# EAGLE board rs485boardPanelize (EAGLE 9.0.0), part 1 of 3
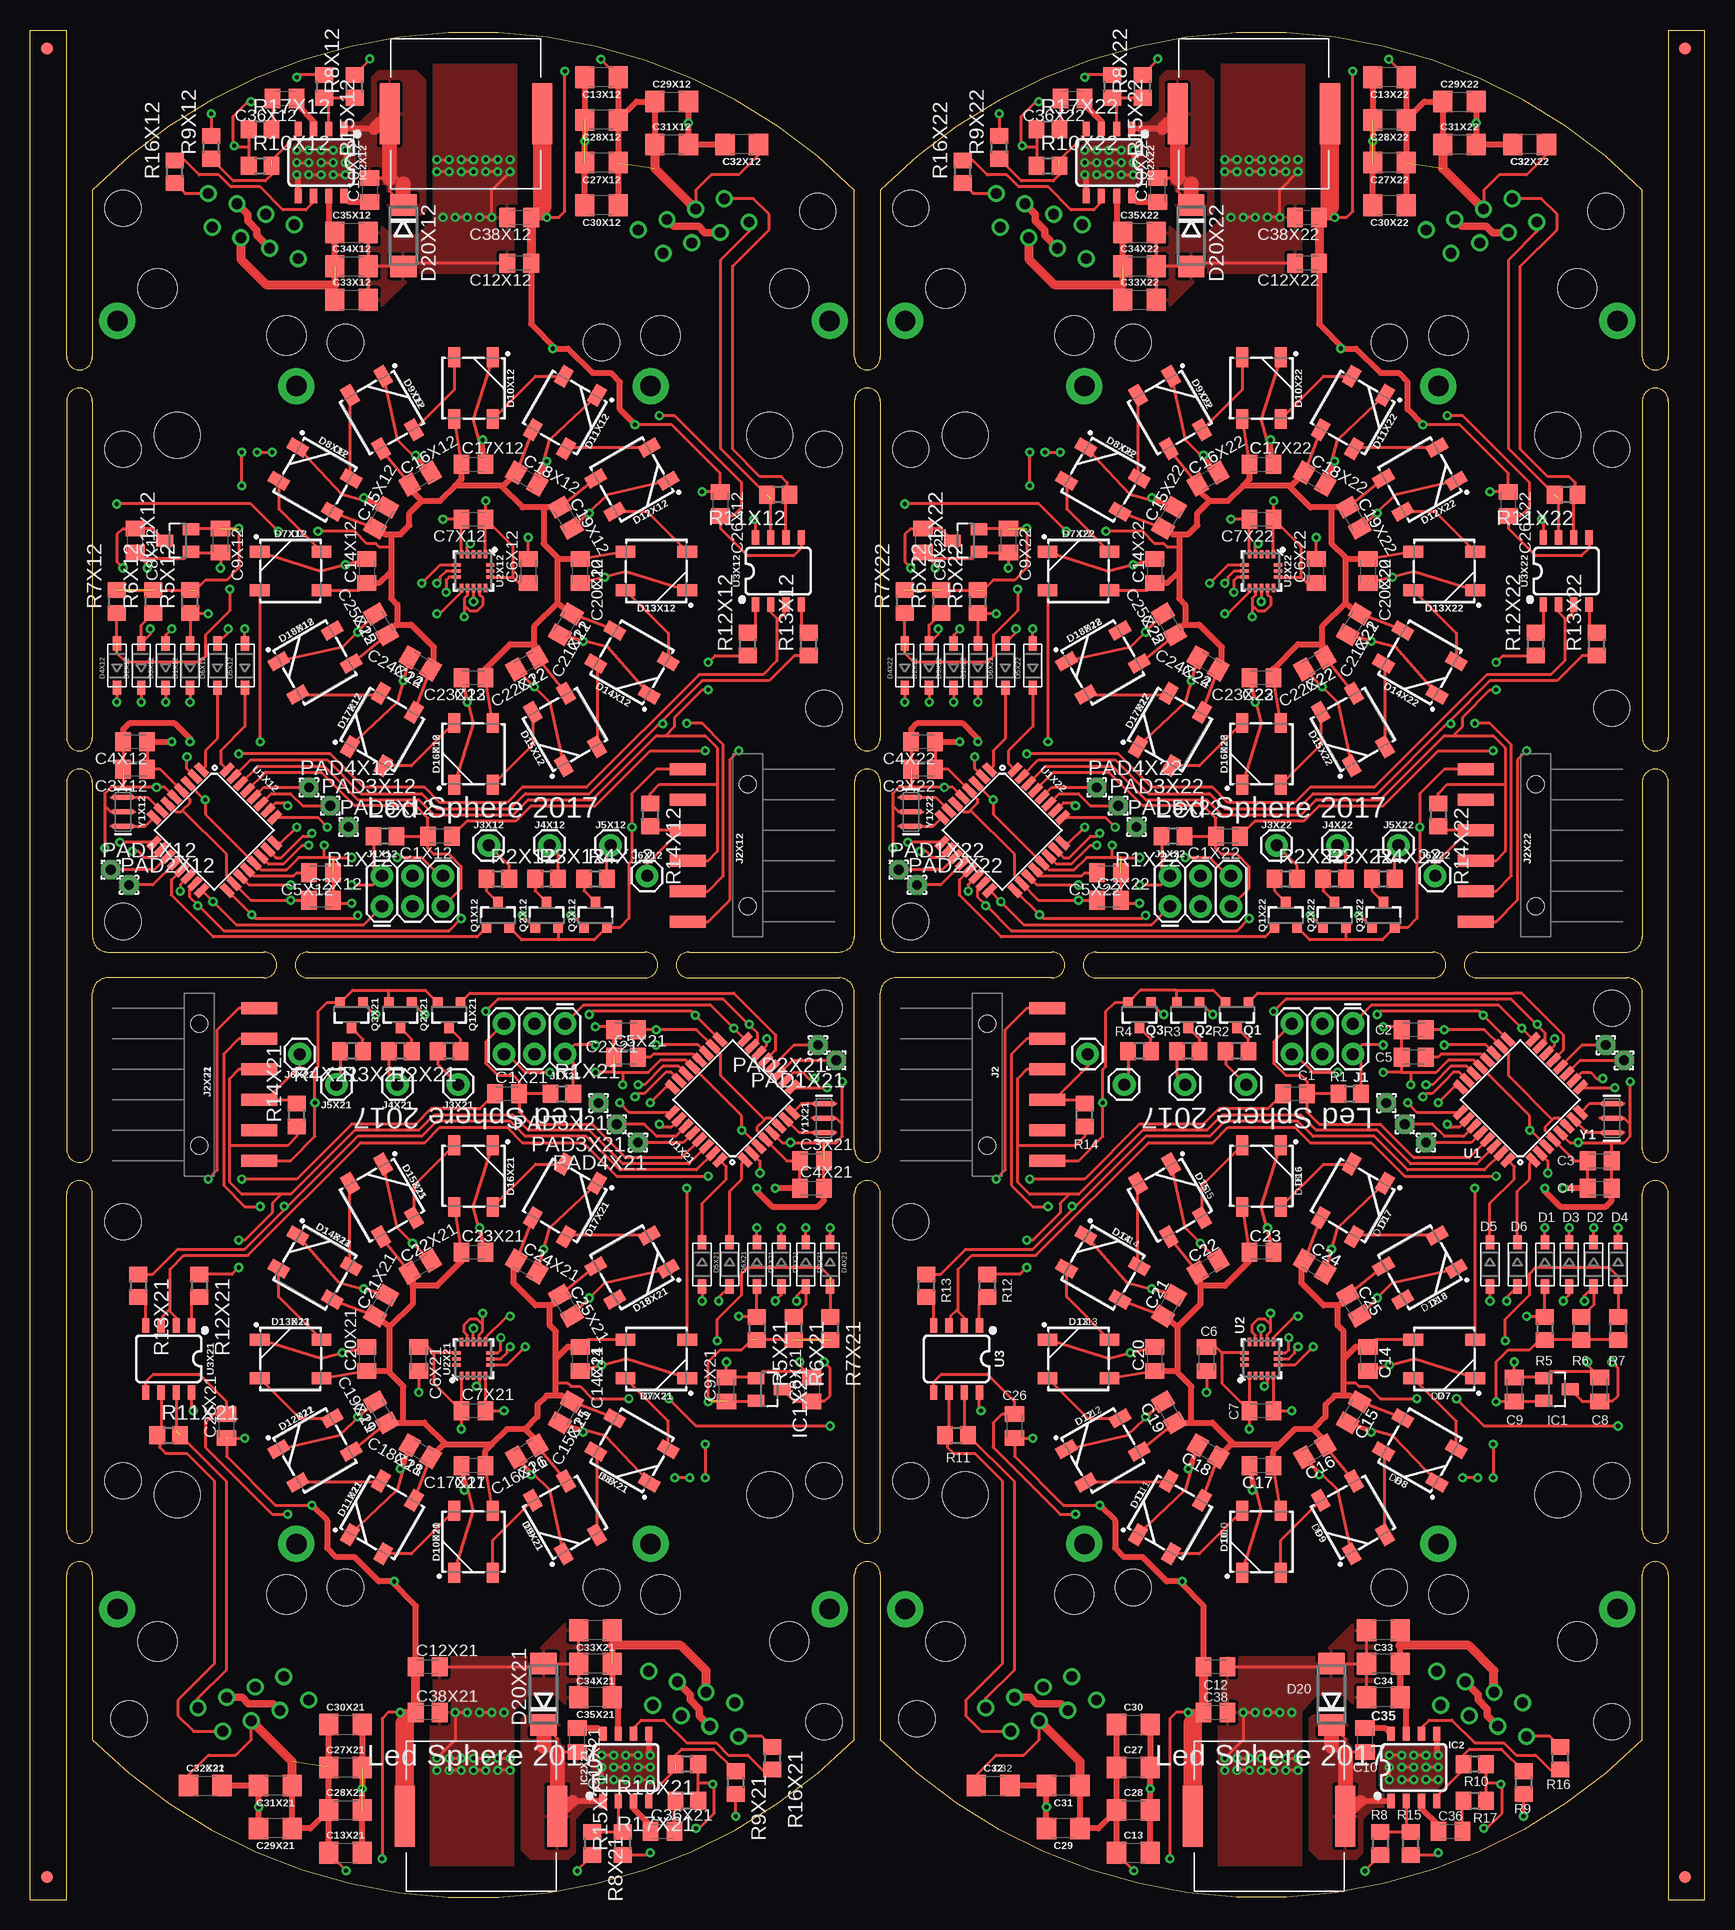
[diagram p0: board, top side]
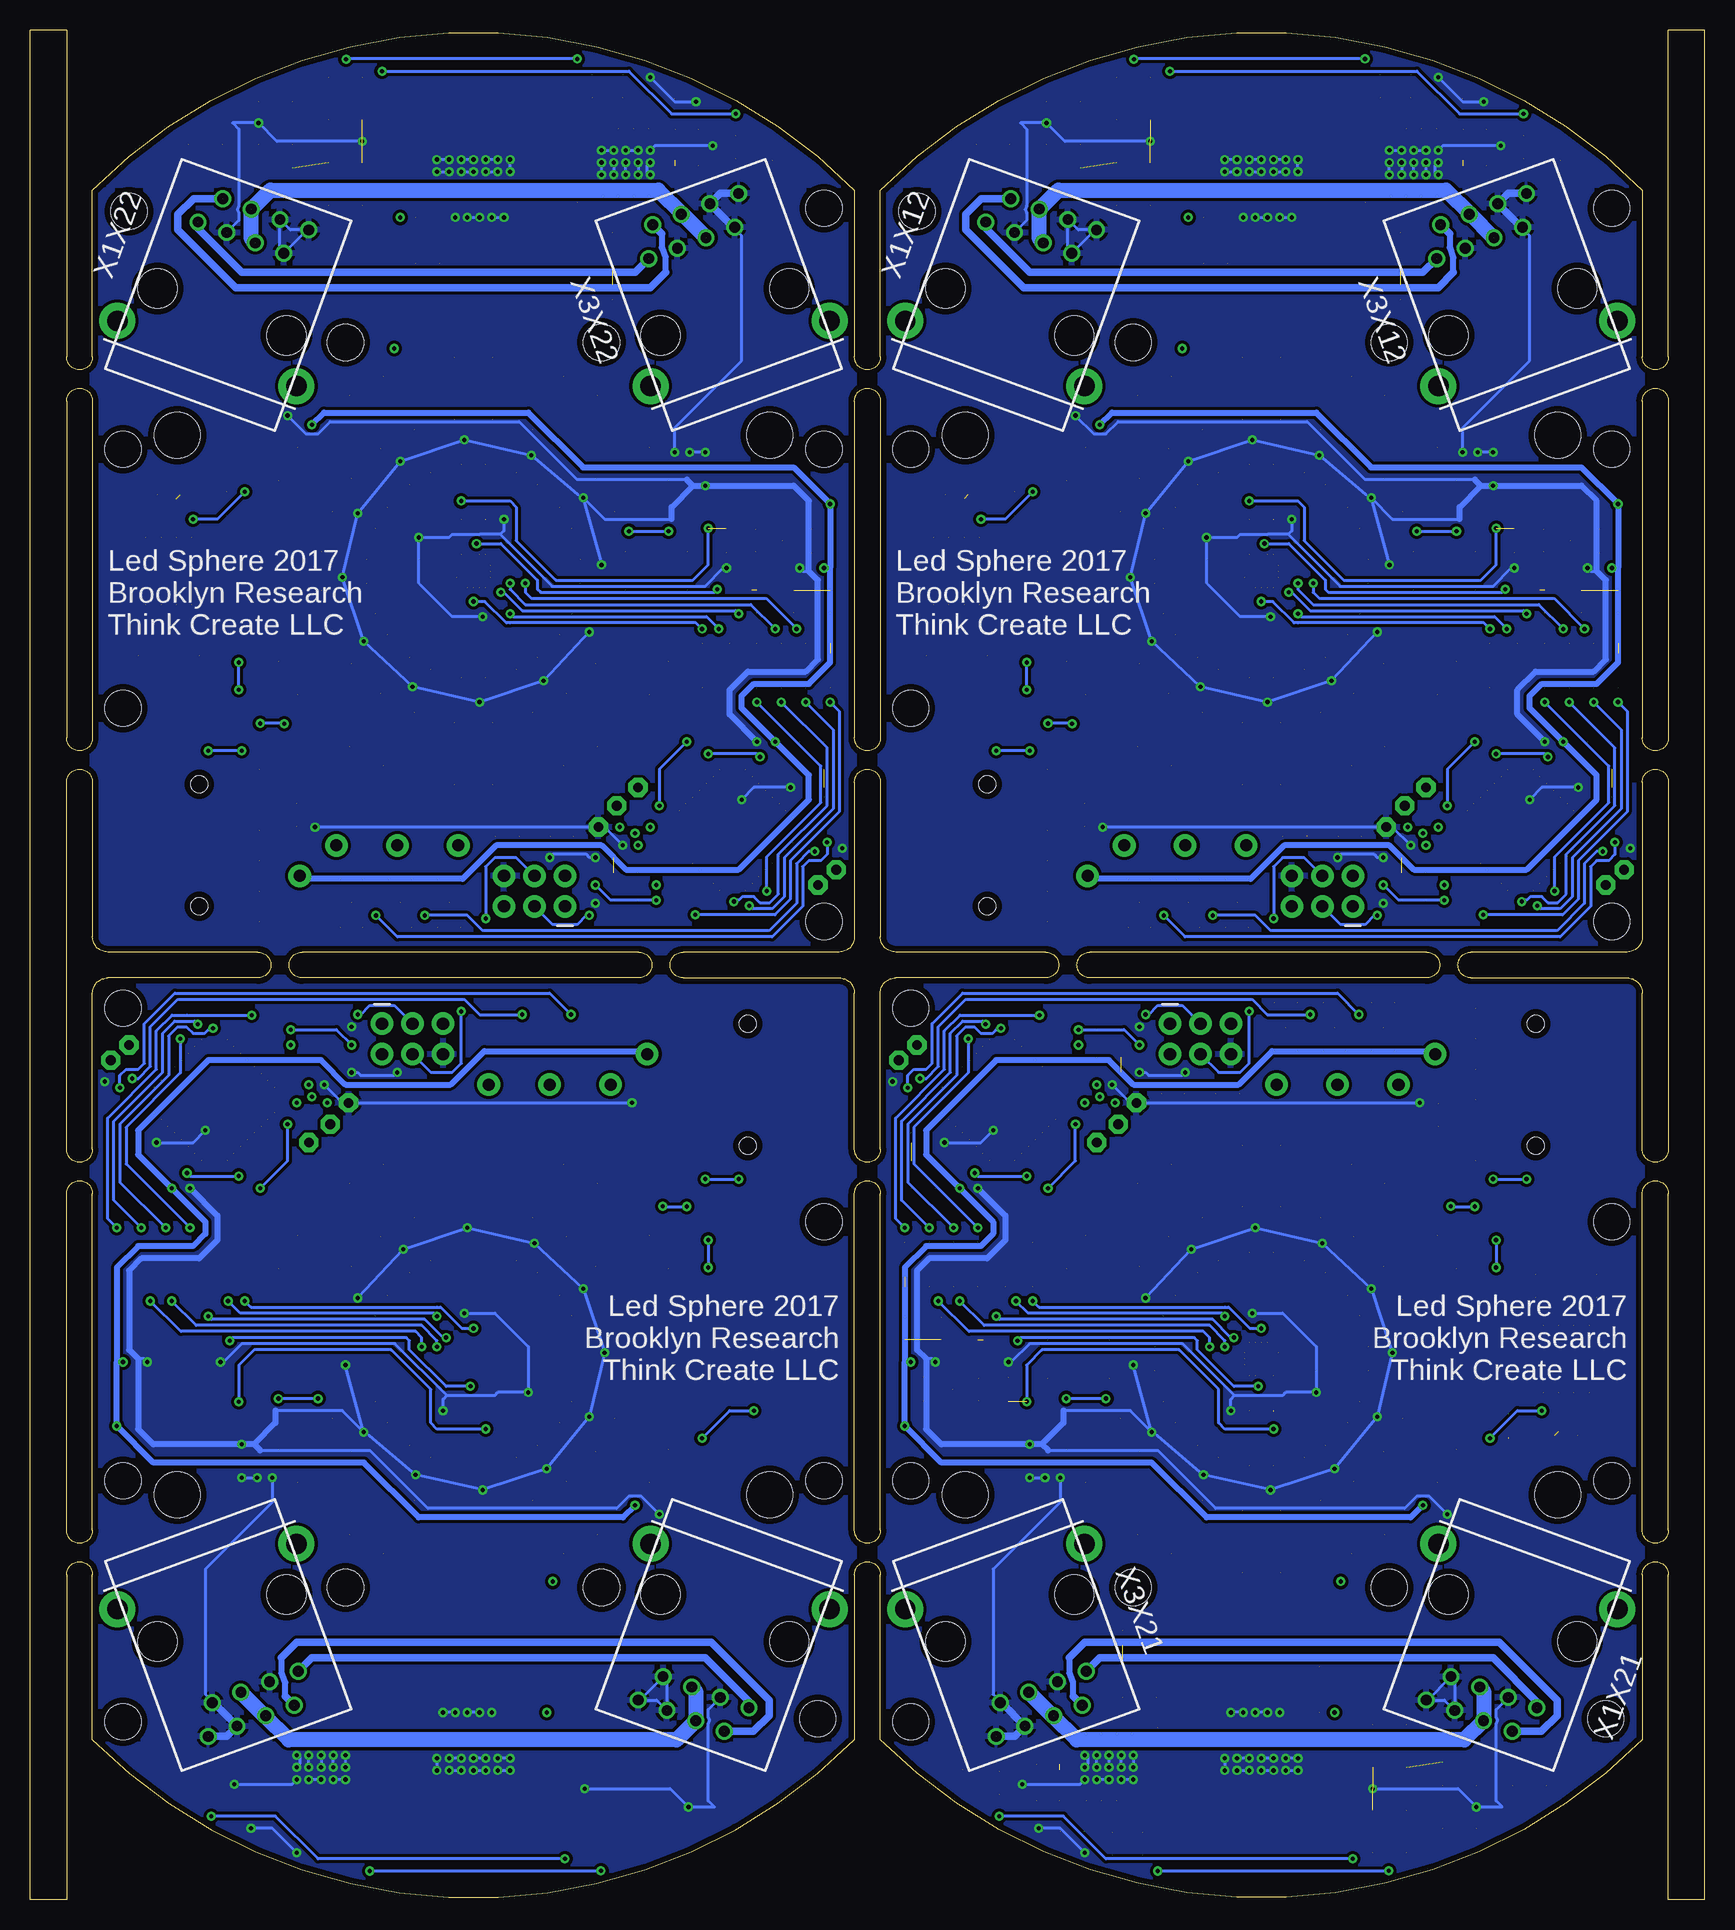
[diagram p1: board, bottom side, seen from below]

Size 139.57 x 155.83 mm. Coordinates in mm from the lower left corner, seen from the top.
Outline: 134.37,75.56 arc90 133.1,76.83
Outline: 6.48,78.99 19.49,78.99 arc-180 19.49,76.83 6.48,76.83
Outline: 5.21,80.26 arc90 6.48,78.99
Outline: 6.48,76.83 arc90 5.21,75.56
Outline: 133.1,78.99 arc90 134.37,80.26
Outline: 133.1,78.99 120.59,78.99 arc180 120.59,76.83 133.1,76.83
Outline: 6.48,76.83 arc90 5.21,75.56
Outline: 5.21,80.26 arc90 6.48,78.99
Outline: 5.21,75.56 5.21,62.55 arc-180 3.05,62.55 3.05,93.15 arc-180 5.21,93.15 5.21,80.26
Outline: 133.1,78.99 arc90 134.37,80.26
Outline: 134.37,75.56 arc90 133.1,76.83
Outline: 134.37,75.56 134.37,62.55 arc180 136.53,62.55 136.53,93.15 arc180 134.37,93.15 134.37,80.26
Outline: 72.14,76.83 arc90 70.87,75.56 70.87,62.55 arc-180 68.71,62.55 68.71,75.56 arc90 67.44,76.83 54.93,76.83 arc-180 54.93,78.99 67.44,78.99 arc90 68.71,80.26 68.71,93.15 arc-180 70.87,93.15 70.87,80.26 arc90 72.14,78.99 85.15,78.99 arc-180 85.15,76.83 72.14,76.83
Outline: 134.37,13.34 arc-90 70.87,13.34 70.87,27.11 arc180 68.71,27.11 68.71,13.34 arc-90 5.21,13.34 5.21,27.11 arc180 3.05,27.11 3.05,0 0,0 0,155.83 3.05,155.83 3.05,128.59 arc180 5.21,128.59 5.21,142.49 arc-90 68.71,142.49 68.71,128.59 arc180 70.87,128.59 70.87,142.49 arc-90 134.37,142.49 134.37,128.59 arc180 136.53,128.59 136.53,155.83 139.57,155.83 139.57,0 136.53,0 136.53,27.11 arc180 134.37,27.11 134.37,13.34
Outline: 23.18,78.99 arc180 23.18,76.83 51.24,76.83 arc180 51.24,78.99 23.18,78.99
Outline: 88.84,78.99 arc180 88.84,76.83 116.9,76.83 arc180 116.9,78.99 88.84,78.99
Outline: 68.71,30.8 arc180 70.87,30.8 70.87,58.86 arc180 68.71,58.86 68.71,30.8
Outline: 70.87,124.9 arc180 68.71,124.9 68.71,96.84 arc180 70.87,96.84 70.87,124.9
Outline: 3.05,30.8 arc180 5.21,30.8 5.21,58.86 arc180 3.05,58.86 3.05,30.8
Outline: 5.21,124.9 arc180 3.05,124.9 3.05,96.84 arc180 5.21,96.84 5.21,124.9
Outline: 134.37,30.8 arc180 136.53,30.8 136.53,58.86 arc180 134.37,58.86 134.37,30.8
Outline: 136.53,124.9 arc180 134.37,124.9 134.37,96.84 arc180 136.53,96.84 136.53,124.9
Copper layers (1*16): Top 0.035mm / dielectric 1.5mm / Bottom 0.035mm
Design rules "eagleRules *": minimum track width 10mil, minimum drill 0.3mm, track to track 10mil, track to pad 10mil, pad to pad 8mil, via to via 10mil, smd to smd 8mil, copper to edge 20mil, drill to drill 20mil, minimum pad ring 10mil, minimum via ring 8mil, stop-mask expansion 4mil, vias tented up to drill 14mil, thermal gap 10mil
Holes 3 mm at 131.83,74.3 73.41,56.52 131.83,34.92 73.41,34.92 113.28,26.04 91.95,26.04 131.83,14.86 73.91,15.11 7.75,81.53 66.17,99.31 7.75,120.9 66.17,120.9 26.29,129.79 47.62,129.79 7.75,140.97 65.66,140.72 66.17,74.3 7.75,56.52 66.17,34.92 7.75,34.92 47.62,26.04 26.29,26.04 66.17,14.86 8.25,15.11 73.41,81.53 131.83,99.31 73.41,120.9 131.83,120.9 91.95,129.79 113.28,129.79 73.41,140.97 131.32,140.72
Holes 3.81 mm at 127.3,33.76 77.93,33.76 12.27,122.07 61.65,122.07 61.65,33.76 12.27,33.76 77.93,122.07 127.3,122.07

## Footprints (pad centres in the part's own frame; a part is rotated, then mirrored left to right if it is on the bottom)
C0805K = smd 1.3 x 1.6: 1 -1,0; 2 1,0
1206 = smd 1.6 x 1.8: 1 -1.4,0; 2 1.4,0
SOD-123 = smd 1.2 x 0.7: A 1.85,0; C -1.85,0
WS2812B = smd 1.651 x 1: 1 2.577,-1.6; 2 2.577,1.6; 3 -2.577,1.6; 4 -2.577,-1.6
DO214AA = smd 1.8 x 2.2: A 2.55,0; C -2.55,0
FIDUCIAL-1X2 = smd 1 x 1: 1 0,0
SOT23 = smd 1 x 1.4: 1 -0.95,-1.1; 2 0.95,-1.1; 3 0,1.1
SO08 = smd 0.6 x 1.2: 1 -1.905,-2.8; 2 -0.635,-2.8; 3 0.635,-2.8; 4 1.905,-2.8; 5 1.905,2.8; 6 0.635,2.8; 7 -0.635,2.8; 8 -1.905,2.8
2X3 = drill 1.016 pad 1.88: 1 0,0; 2 0,2.54; 3 2.54,0; 4 2.54,2.54; 5 5.08,0; 6 5.08,2.54
1X06-SMD_RA_MALE = smd 1 x 3: 1 -6.35,5; 2 -3.81,5; 3 -1.27,5; 4 1.27,5; 5 3.81,5; 6 6.35,5 | hole 1.4: -5.08,0; 5.08,0
1X01 = drill 1.016 pad 1.88: 1 0,0
SLF12575 = smd 1.676 x 5.08: P$1 -6.35,0; P$2 6.35,0
1,6/0,8 = drill 0.813 pad 1.6 octagon: 1 0,0
SOT23-3 = smd 0.8 x 0.9: 1 -0.95,-1; 2 0.95,-1; 3 0,1.1
R0805 = smd 1.3 x 1.5: 1 -0.95,0; 2 0.95,0
TQFP32-08 = smd 1.27 x 0.559: 1 -4.293,2.8; 2 -4.293,2; 3 -4.293,1.2; 4 -4.293,0.4; 5 -4.293,-0.4; 6 -4.293,-1.2; 7 -4.293,-2; 8 -4.293,-2.8; 17 4.293,-2.8; 18 4.293,-2; 19 4.293,-1.2; 20 4.293,-0.4; 21 4.293,0.4; 22 4.293,1.2; 23 4.293,2; 24 4.293,2.8 | smd 0.559 x 1.27: 9 -2.8,-4.293; 10 -2,-4.293; 11 -1.2,-4.293; 12 -0.4,-4.293; 13 0.4,-4.293; 14 1.2,-4.293; 15 2,-4.293; 16 2.8,-4.293; 25 2.8,4.293; 26 2,4.293; 27 1.2,4.293; 28 0.4,4.293; 29 -0.4,4.293; 30 -1.2,4.293; 31 -2,4.293; 32 -2.8,4.293
LGA-16-3X3 = smd 0.7 x 0.28: 1 -1.4,1; 2 -1.4,0.5; 3 -1.4,0; 4 -1.4,-0.5; 5 -1.4,-1; 9 1.4,-1; 10 1.4,-0.5; 11 1.4,0; 12 1.4,0.5; 13 1.4,1 | smd 0.28 x 0.7: 6 -0.5,-1.4; 7 0,-1.4; 8 0.5,-1.4; 14 0.5,1.4; 15 0,1.4; 16 -0.5,1.4
RJ45-SHIELD-DS1128-S80BP = drill 0.9 pad 1.4: 1 -4.445,6.35; 2 -3.175,8.89; 3 -1.905,6.35; 4 -0.635,8.89; 5 0.635,6.35; 6 1.905,8.89; 7 3.175,6.35; 8 4.445,8.89 | drill 1.7 pad 3: SHIELD1 -7.94,-3.68; SHIELD2 7.94,-3.68 | hole 3.251: -5.715,0; 5.715,0
RESONATOR-SMD-3.2X1.3 = smd 0.45 x 1.905: 1 -1.2,0; 2 0,0; 3 1.2,0

## Placement (x,y rotation side)
C1  0.1uF  [C0805K]  105.41,67.18 0 top
C1X12  0.1uF  [C0805K]  34.16,88.65 180 top
C1X21  0.1uF  [C0805K]  39.75,67.18 0 top
C1X22  0.1uF  [C0805K]  99.82,88.65 180 top
C2  10uF  [C0805K]  115.32,72.52 180 top
C2X12  10uF  [C0805K]  24.26,83.31 0 top
C2X21  10uF  [C0805K]  49.66,72.52 180 top
C2X22  10uF  [C0805K]  89.92,83.31 0 top
C3  0.1uF  [C0805K]  130.81,61.59 0 top
C3X12  0.1uF  [C0805K]  8.76,94.23 180 top
C3X21  0.1uF  [C0805K]  65.15,61.59 0 top
C3X22  0.1uF  [C0805K]  74.42,94.23 180 top
C4  0.1uF  [C0805K]  130.81,59.31 0 top
C4X12  0.1uF  [C0805K]  8.76,96.52 180 top
C4X21  0.1uF  [C0805K]  65.15,59.31 0 top
C4X22  0.1uF  [C0805K]  74.42,96.52 180 top
C5  0.1uF  [C0805K]  115.32,70.23 0 top
C5X12  0.1uF  [C0805K]  24.26,85.6 180 top
C5X21  0.1uF  [C0805K]  49.66,70.23 0 top
C5X22  0.1uF  [C0805K]  89.92,85.6 180 top
C6  10uF  [C0805K]  98.04,45.09 270 top
C6X12  10uF  [C0805K]  41.53,110.74 90 top
C6X21  10uF  [C0805K]  32.38,45.09 270 top
C6X22  10uF  [C0805K]  107.19,110.74 90 top
C7  0.1uF  [C0805K]  102.62,40.77 0 top
C7X12  0.1uF  [C0805K]  36.96,115.06 180 top
C7X21  0.1uF  [C0805K]  36.96,40.77 0 top
C7X22  0.1uF  [C0805K]  102.62,115.06 180 top
C8  0.1uF  [C0805K]  130.81,42.55 90 top
C8X12  0.1uF  [C0805K]  8.76,113.28 270 top
C8X21  0.1uF  [C0805K]  65.15,42.55 90 top
C8X22  0.1uF  [C0805K]  74.42,113.28 270 top
C9  0.1uF  [C0805K]  123.7,42.55 90 top
C9X12  0.1uF  [C0805K]  15.88,113.28 270 top
C9X21  0.1uF  [C0805K]  58.04,42.55 90 top
C9X22  0.1uF  [C0805K]  81.53,113.28 270 top
C10  0.1uF  [C0805K]  111.25,13.34 270 top
C10X12  0.1uF  [C0805K]  28.32,142.49 90 top
C10X21  0.1uF  [C0805K]  45.59,13.34 270 top
C10X22  0.1uF  [C0805K]  93.98,142.49 90 top
C12  10uF  [C0805K]  98.81,19.43 0 top
C12X12  10uF  [C0805K]  40.77,136.4 180 top
C12X21  10uF  [C0805K]  33.15,19.43 0 top
C12X22  10uF  [C0805K]  106.43,136.4 180 top
C13  1uF 100V  [1206]  91.95,3.94 0 top
C13X12  1uF 100V  [1206]  47.62,151.89 180 top
C13X21  1uF 100V  [1206]  26.29,3.94 0 top
C13X22  1uF 100V  [1206]  113.28,151.89 180 top
C14  0.1uF  [C0805K]  111.51,45.09 270 top
C14X12  0.1uF  [C0805K]  28.07,110.74 90 top
C14X21  0.1uF  [C0805K]  45.85,45.09 270 top
C14X22  0.1uF  [C0805K]  93.73,110.74 90 top
C15  0.1uF  [C0805K]  110.31,40.64 240 top
C15X12  0.1uF  [C0805K]  29.26,115.19 60 top
C15X21  0.1uF  [C0805K]  44.65,40.64 240 top
C15X22  0.1uF  [C0805K]  94.92,115.19 60 top
C16  0.1uF  [C0805K]  107.06,37.39 210 top
C16X12  0.1uF  [C0805K]  32.51,118.44 30 top
C16X21  0.1uF  [C0805K]  41.4,37.39 210 top
C16X22  0.1uF  [C0805K]  98.17,118.44 30 top
C17  0.1uF  [C0805K]  102.62,36.2 180 top
C17X12  0.1uF  [C0805K]  36.96,119.63 0 top
C17X21  0.1uF  [C0805K]  36.96,36.2 180 top
C17X22  0.1uF  [C0805K]  102.62,119.63 0 top
C18  0.1uF  [C0805K]  98.17,37.39 150 top
C18X12  0.1uF  [C0805K]  41.4,118.44 330 top
C18X21  0.1uF  [C0805K]  32.51,37.39 150 top
C18X22  0.1uF  [C0805K]  107.06,118.44 330 top
C19  0.1uF  [C0805K]  94.92,40.64 120 top
C19X12  0.1uF  [C0805K]  44.65,115.19 300 top
C19X21  0.1uF  [C0805K]  29.26,40.64 120 top
C19X22  0.1uF  [C0805K]  110.31,115.19 300 top
C20  0.1uF  [C0805K]  93.73,45.09 90 top
C20X12  0.1uF  [C0805K]  45.85,110.74 270 top
C20X21  0.1uF  [C0805K]  28.07,45.09 90 top
C20X22  0.1uF  [C0805K]  111.51,110.74 270 top
C21  0.1uF  [C0805K]  94.92,49.53 60 top
C21X12  0.1uF  [C0805K]  44.65,106.3 240 top
C21X21  0.1uF  [C0805K]  29.26,49.53 60 top
C21X22  0.1uF  [C0805K]  110.31,106.3 240 top
C22  0.1uF  [C0805K]  98.17,52.78 30 top
C22X12  0.1uF  [C0805K]  41.4,103.05 210 top
C22X21  0.1uF  [C0805K]  32.51,52.78 30 top
C22X22  0.1uF  [C0805K]  107.06,103.05 210 top
C23  0.1uF  [C0805K]  102.62,53.98 0 top
C23X12  0.1uF  [C0805K]  36.96,101.85 180 top
C23X21  0.1uF  [C0805K]  36.96,53.98 0 top
C23X22  0.1uF  [C0805K]  102.62,101.85 180 top
C24  0.1uF  [C0805K]  107.06,52.78 330 top
C24X12  0.1uF  [C0805K]  32.51,103.05 150 top
C24X21  0.1uF  [C0805K]  41.4,52.78 330 top
C24X22  0.1uF  [C0805K]  98.17,103.05 150 top
C25  0.1uF  [C0805K]  110.31,49.53 300 top
C25X12  0.1uF  [C0805K]  29.26,106.3 120 top
C25X21  0.1uF  [C0805K]  44.65,49.53 300 top
C25X22  0.1uF  [C0805K]  94.92,106.3 120 top
C26  0.1uF  [C0805K]  82.04,39.5 90 top
C26X12  0.1uF  [C0805K]  57.53,116.33 270 top
C26X21  0.1uF  [C0805K]  16.38,39.5 90 top
C26X22  0.1uF  [C0805K]  123.19,116.33 270 top
C27  1uF 100V  [1206]  91.95,11.05 0 top
C27X12  1uF 100V  [1206]  47.62,144.78 180 top
C27X21  1uF 100V  [1206]  26.29,11.05 0 top
C27X22  1uF 100V  [1206]  113.28,144.78 180 top
C28  1uF 100V  [1206]  91.95,7.49 0 top
C28X12  1uF 100V  [1206]  47.62,148.34 180 top
C28X21  1uF 100V  [1206]  26.29,7.49 0 top
C28X22  1uF 100V  [1206]  113.28,148.34 180 top
C29  1uF 100V  [1206]  86.11,5.97 180 top
C29X12  1uF 100V  [1206]  53.47,149.86 0 top
C29X21  1uF 100V  [1206]  20.45,5.97 180 top
C29X22  1uF 100V  [1206]  119.13,149.86 0 top
C30  1uF 100V  [1206]  91.95,14.61 0 top
C30X12  1uF 100V  [1206]  47.62,141.22 180 top
C30X21  1uF 100V  [1206]  26.29,14.61 0 top
C30X22  1uF 100V  [1206]  113.28,141.22 180 top
C31  1uF 100V  [1206]  86.11,9.53 180 top
C31X12  1uF 100V  [1206]  53.47,146.3 0 top
C31X21  1uF 100V  [1206]  20.45,9.53 180 top
C31X22  1uF 100V  [1206]  119.13,146.3 0 top
C32  1uF 100V  [1206]  80.26,9.53 0 top
C32X12  1uF 100V  [1206]  59.31,146.3 180 top
C32X21  1uF 100V  [1206]  14.61,9.53 0 top
C32X22  1uF 100V  [1206]  124.97,146.3 180 top
C33  1uF 100V  [1206]  112.78,22.48 180 top
C33X12  1uF 100V  [1206]  26.8,133.35 0 top
C33X21  1uF 100V  [1206]  47.12,22.48 180 top
C33X22  1uF 100V  [1206]  92.46,133.35 0 top
C34  1uF 100V  [1206]  112.78,19.68 180 top
C34X12  1uF 100V  [1206]  26.8,136.14 0 top
C34X21  1uF 100V  [1206]  47.12,19.68 180 top
C34X22  1uF 100V  [1206]  92.46,136.14 0 top
C35  1uF 100V  [1206]  112.78,16.89 180 top
C35X12  1uF 100V  [1206]  26.8,138.94 0 top
C35X21  1uF 100V  [1206]  47.12,16.89 180 top
C35X22  1uF 100V  [1206]  92.46,138.94 0 top
C36  150pF  [C0805K]  118.36,5.71 0 top
C36X12  150pF  [C0805K]  21.21,150.11 180 top
C36X21  150pF  [C0805K]  52.7,5.71 0 top
C36X22  150pF  [C0805K]  86.87,150.11 180 top
C38  10uF  [C0805K]  98.81,15.62 0 top
C38X12  10uF  [C0805K]  40.77,140.21 180 top
C38X21  10uF  [C0805K]  33.15,15.62 0 top
C38X22  10uF  [C0805K]  106.43,140.21 180 top
D1  5819  [SOD-123]  126.24,52.96 270 top
D1X12  5819  [SOD-123]  13.34,102.87 90 top
D1X21  5819  [SOD-123]  60.58,52.96 270 top
D1X22  5819  [SOD-123]  78.99,102.87 90 top
D2  5819  [SOD-123]  130.3,52.96 270 top
D2X12  5819  [SOD-123]  9.27,102.87 90 top
D2X21  5819  [SOD-123]  64.64,52.96 270 top
D2X22  5819  [SOD-123]  74.93,102.87 90 top
D3  5819  [SOD-123]  128.27,52.96 270 top
D3X12  5819  [SOD-123]  11.3,102.87 90 top
D3X21  5819  [SOD-123]  62.61,52.96 270 top
D3X22  5819  [SOD-123]  76.96,102.87 90 top
D4  5819  [SOD-123]  132.33,52.96 270 top
D4X12  5819  [SOD-123]  7.24,102.87 90 top
D4X21  5819  [SOD-123]  66.67,52.96 270 top
D4X22  5819  [SOD-123]  72.9,102.87 90 top
D5  5819  [SOD-123]  121.67,52.96 270 top
D5X12  5819  [SOD-123]  17.91,102.87 90 top
D5X21  5819  [SOD-123]  56.01,52.96 270 top
D5X22  5819  [SOD-123]  83.57,102.87 90 top
D6  5819  [SOD-123]  123.95,52.96 270 top
D6X12  5819  [SOD-123]  15.62,102.87 90 top
D6X21  5819  [SOD-123]  58.29,52.96 270 top
D6X22  5819  [SOD-123]  81.28,102.87 90 top
D7  WS2812B  [WS2812B]  117.86,45.09 180 top
D7X12  WS2812B  [WS2812B]  21.72,110.74 0 top
D7X21  WS2812B  [WS2812B]  52.2,45.09 180 top
D7X22  WS2812B  [WS2812B]  87.38,110.74 0 top
D8  WS2812B  [WS2812B]  115.82,37.47 150 top
D8X12  WS2812B  [WS2812B]  23.75,118.36 330 top
D8X21  WS2812B  [WS2812B]  50.16,37.47 150 top
D8X22  WS2812B  [WS2812B]  89.41,118.36 330 top
D9  WS2812B  [WS2812B]  110.24,31.88 120 top
D9X12  WS2812B  [WS2812B]  29.34,123.95 300 top
D9X21  WS2812B  [WS2812B]  44.58,31.88 120 top
D9X22  WS2812B  [WS2812B]  95,123.95 300 top
D10  WS2812B  [WS2812B]  102.62,29.84 90 top
D10X12  WS2812B  [WS2812B]  36.96,125.98 270 top
D10X21  WS2812B  [WS2812B]  36.96,29.84 90 top
D10X22  WS2812B  [WS2812B]  102.62,125.98 270 top
D11  WS2812B  [WS2812B]  95,31.88 60 top
D11X12  WS2812B  [WS2812B]  44.58,123.95 240 top
D11X21  WS2812B  [WS2812B]  29.34,31.88 60 top
D11X22  WS2812B  [WS2812B]  110.24,123.95 240 top
D12  WS2812B  [WS2812B]  89.41,37.47 30 top
D12X12  WS2812B  [WS2812B]  50.16,118.36 210 top
D12X21  WS2812B  [WS2812B]  23.75,37.47 30 top
D12X22  WS2812B  [WS2812B]  115.82,118.36 210 top
D13  WS2812B  [WS2812B]  87.38,45.09 0 top
D13X12  WS2812B  [WS2812B]  52.2,110.74 180 top
D13X21  WS2812B  [WS2812B]  21.72,45.09 0 top
D13X22  WS2812B  [WS2812B]  117.86,110.74 180 top
D14  WS2812B  [WS2812B]  89.41,52.7 330 top
D14X12  WS2812B  [WS2812B]  50.16,103.12 150 top
D14X21  WS2812B  [WS2812B]  23.75,52.7 330 top
D14X22  WS2812B  [WS2812B]  115.82,103.12 150 top
D15  WS2812B  [WS2812B]  95,58.29 300 top
D15X12  WS2812B  [WS2812B]  44.58,97.54 120 top
D15X21  WS2812B  [WS2812B]  29.34,58.29 300 top
D15X22  WS2812B  [WS2812B]  110.24,97.54 120 top
D16  WS2812B  [WS2812B]  102.62,60.33 270 top
D16X12  WS2812B  [WS2812B]  36.96,95.5 90 top
D16X21  WS2812B  [WS2812B]  36.96,60.33 270 top
D16X22  WS2812B  [WS2812B]  102.62,95.5 90 top
D17  WS2812B  [WS2812B]  110.24,58.29 240 top
D17X12  WS2812B  [WS2812B]  29.34,97.54 60 top
D17X21  WS2812B  [WS2812B]  44.58,58.29 240 top
D17X22  WS2812B  [WS2812B]  95,97.54 60 top
D18  WS2812B  [WS2812B]  115.82,52.7 210 top
D18X12  WS2812B  [WS2812B]  23.75,103.12 30 top
D18X21  WS2812B  [WS2812B]  50.16,52.7 210 top
D18X22  WS2812B  [WS2812B]  89.41,103.12 30 top
D20  B280-13-F  [DO214AA]  108.46,17.14 90 top
D20X12  B280-13-F  [DO214AA]  31.12,138.68 270 top
D20X21  B280-13-F  [DO214AA]  42.8,17.14 90 top
D20X22  B280-13-F  [DO214AA]  96.77,138.68 270 top
E$1  [FIDUCIAL-1X2]  1.4,154.31 0 top
E$2  [FIDUCIAL-1X2]  1.4,1.91 0 top
E$3  [FIDUCIAL-1X2]  137.92,1.91 0 top
E$4  [FIDUCIAL-1X2]  137.92,154.31 0 top
IC1  XC6206P332MR  [SOT23]  127.25,42.55 270 top
IC1X12  XC6206P332MR  [SOT23]  12.32,113.28 90 top
IC1X21  XC6206P332MR  [SOT23]  61.59,42.55 270 top
IC1X22  XC6206P332MR  [SOT23]  77.98,113.28 90 top
IC2  MP2562  [SO08]  115.32,11.05 0 top
IC2X12  MP2562  [SO08]  24.26,144.78 180 top
IC2X21  MP2562  [SO08]  49.66,11.05 0 top
IC2X22  MP2562  [SO08]  89.92,144.78 180 top
J1  AVR_SPI_PROG_3X2PTH  [2X3]  110.24,73.03 180 top
J1X12  AVR_SPI_PROG_3X2PTH  [2X3]  29.34,82.8 0 top
J1X21  AVR_SPI_PROG_3X2PTH  [2X3]  44.58,73.03 180 top
J1X22  AVR_SPI_PROG_3X2PTH  [2X3]  95,82.8 0 top
J2  RA 6Pin SMD  [1X06-SMD_RA_MALE]  79.76,67.94 270 top
J2X12  RA 6Pin SMD  [1X06-SMD_RA_MALE]  59.82,87.88 90 top
J2X21  RA 6Pin SMD  [1X06-SMD_RA_MALE]  14.1,67.94 270 top
J2X22  RA 6Pin SMD  [1X06-SMD_RA_MALE]  125.48,87.88 90 top
J3  [1X01]  101.35,67.94 180 top
J3X12  [1X01]  38.23,87.88 0 top
J3X21  [1X01]  35.69,67.94 180 top
J3X22  [1X01]  103.89,87.88 0 top
J4  [1X01]  96.27,67.94 180 top
J4X12  [1X01]  43.31,87.88 0 top
J4X21  [1X01]  30.61,67.94 180 top
J4X22  [1X01]  108.97,87.88 0 top
J5  [1X01]  91.19,67.94 180 top
J5X12  [1X01]  48.39,87.88 0 top
J5X21  [1X01]  25.53,67.94 180 top
J5X22  [1X01]  114.05,87.88 0 top
J6  [1X01]  88.14,70.48 180 top
J6X12  [1X01]  51.44,85.34 0 top
J6X21  [1X01]  22.48,70.48 180 top
J6X22  [1X01]  117.09,85.34 0 top
L1  15uH  [SLF12575]  103.25,6.99 180 top
L1X12  15uH  [SLF12575]  36.32,148.84 0 top
L1X21  15uH  [SLF12575]  37.59,6.99 180 top
L1X22  15uH  [SLF12575]  101.98,148.84 0 top
PAD1  [1,6/0,8]  132.84,69.98 180 top
PAD1X12  [1,6/0,8]  6.73,85.85 0 top
PAD1X21  [1,6/0,8]  67.18,69.98 180 top
PAD1X22  [1,6/0,8]  72.39,85.85 0 top
PAD2  [1,6/0,8]  131.32,71.25 180 top
PAD2X12  [1,6/0,8]  8.25,84.58 0 top
PAD2X21  [1,6/0,8]  65.66,71.25 180 top
PAD2X22  [1,6/0,8]  73.91,84.58 0 top
PAD3  [1,6/0,8]  114.55,64.64 180 top
PAD3X12  [1,6/0,8]  25.02,91.19 0 top
PAD3X21  [1,6/0,8]  48.9,64.64 180 top
PAD3X22  [1,6/0,8]  90.68,91.19 0 top
PAD4  [1,6/0,8]  116.33,63.12 180 top
PAD4X12  [1,6/0,8]  23.24,92.71 0 top
PAD4X21  [1,6/0,8]  50.67,63.12 180 top
PAD4X22  [1,6/0,8]  88.9,92.71 0 top
PAD5  [1,6/0,8]  113.03,66.42 180 top
PAD5X12  [1,6/0,8]  26.54,89.41 0 top
PAD5X21  [1,6/0,8]  47.37,66.42 180 top
PAD5X22  [1,6/0,8]  92.2,89.41 0 top
Q1  CJ3404  [SOT23-3]  100.58,73.79 180 top
Q1X12  CJ3404  [SOT23-3]  38.99,82.04 0 top
Q1X21  CJ3404  [SOT23-3]  34.92,73.79 180 top
Q1X22  CJ3404  [SOT23-3]  104.65,82.04 0 top
Q2  CJ3404  [SOT23-3]  96.52,73.79 180 top
Q2X12  CJ3404  [SOT23-3]  43.05,82.04 0 top
Q2X21  CJ3404  [SOT23-3]  30.86,73.79 180 top
Q2X22  CJ3404  [SOT23-3]  108.71,82.04 0 top
Q3  CJ3404  [SOT23-3]  92.46,73.79 180 top
Q3X12  CJ3404  [SOT23-3]  47.12,82.04 0 top
Q3X21  CJ3404  [SOT23-3]  26.8,73.79 180 top
Q3X22  CJ3404  [SOT23-3]  112.78,82.04 0 top
R1  10K  [R0805]  109.98,67.18 0 top
R1X12  10K  [R0805]  29.59,88.65 180 top
R1X21  10K  [R0805]  44.32,67.18 0 top
R1X22  10K  [R0805]  95.25,88.65 180 top
R2  DNP  [R0805]  100.58,70.74 180 top
R2X12  DNP  [R0805]  38.99,85.09 0 top
R2X21  DNP  [R0805]  34.92,70.74 180 top
R2X22  DNP  [R0805]  104.65,85.09 0 top
R3  DNP  [R0805]  96.52,70.74 180 top
R3X12  DNP  [R0805]  43.05,85.09 0 top
R3X21  DNP  [R0805]  30.86,70.74 180 top
R3X22  DNP  [R0805]  108.71,85.09 0 top
R4  DNP  [R0805]  92.46,70.74 180 top
R4X12  DNP  [R0805]  47.12,85.09 0 top
R4X21  DNP  [R0805]  26.8,70.74 180 top
R4X22  DNP  [R0805]  112.78,85.09 0 top
R5  10K  [R0805]  126.24,47.62 270 top
R5X12  10K  [R0805]  13.34,108.2 90 top
R5X21  10K  [R0805]  60.58,47.62 270 top
R5X22  10K  [R0805]  78.99,108.2 90 top
R6  10K  [R0805]  129.29,47.62 270 top
R6X12  10K  [R0805]  10.29,108.2 90 top
R6X21  10K  [R0805]  63.63,47.62 270 top
R6X22  10K  [R0805]  75.95,108.2 90 top
R7  10K  [R0805]  132.33,47.62 270 top
R7X12  10K  [R0805]  7.24,108.2 90 top
R7X21  10K  [R0805]  66.67,47.62 270 top
R7X22  10K  [R0805]  72.9,108.2 90 top
R8  100K  [R0805]  112.52,4.7 270 top
R8X12  100K  [R0805]  27.05,151.13 90 top
R8X21  100K  [R0805]  46.86,4.7 270 top
R8X22  100K  [R0805]  92.71,151.13 90 top
R9  210K  [R0805]  124.46,9.78 270 top
R9X12  210K  [R0805]  15.11,146.05 90 top
R9X21  210K  [R0805]  58.8,9.78 270 top
R9X22  210K  [R0805]  80.77,146.05 90 top
R10  40.2k  [R0805]  120.4,11.3 180 top
R10X12  40.2k  [R0805]  19.18,144.53 0 top
R10X21  40.2k  [R0805]  54.74,11.3 180 top
R10X22  40.2k  [R0805]  84.84,144.53 0 top
R11  120  [R0805]  77.22,38.73 0 top
R11X12  120  [R0805]  62.36,117.09 180 top
R11X21  120  [R0805]  11.56,38.73 0 top
R11X22  120  [R0805]  128.02,117.09 180 top
R12  1K  [R0805]  79.76,51.18 270 top
R12X12  1K  [R0805]  59.82,104.65 90 top
R12X21  1K  [R0805]  14.1,51.18 270 top
R12X22  1K  [R0805]  125.48,104.65 90 top
R13  1K  [R0805]  74.68,51.18 270 top
R13X12  1K  [R0805]  64.9,104.65 90 top
R13X21  1K  [R0805]  9.02,51.18 270 top
R13X22  1K  [R0805]  130.56,104.65 90 top
R14  10K  [R0805]  87.88,65.41 90 top
R14X12  10K  [R0805]  51.69,90.42 270 top
R14X21  10K  [R0805]  22.23,65.41 90 top
R14X22  10K  [R0805]  117.35,90.42 270 top
R15  17.4K  [R0805]  115.06,4.7 90 top
R15X12  17.4K  [R0805]  24.51,151.13 270 top
R15X21  17.4K  [R0805]  49.4,4.7 90 top
R15X22  17.4K  [R0805]  90.17,151.13 270 top
R16  200K  [R0805]  127.51,11.81 270 top
R16X12  200K  [R0805]  12.06,144.02 90 top
R16X21  200K  [R0805]  61.85,11.81 270 top
R16X22  200K  [R0805]  77.72,144.02 90 top
R17  158K  [R0805]  120.4,8.26 180 top
R17X12  158K  [R0805]  19.18,147.57 0 top
R17X21  158K  [R0805]  54.74,8.26 180 top
R17X22  158K  [R0805]  84.84,147.57 0 top
U1  ATMEGA328P_TQFP  [TQFP32-08]  124.21,66.67 135 top
U1X12  ATMEGA328P_TQFP  [TQFP32-08]  15.37,89.15 315 top
U1X21  ATMEGA328P_TQFP  [TQFP32-08]  58.55,66.67 135 top
U1X22  ATMEGA328P_TQFP  [TQFP32-08]  81.03,89.15 315 top
U2  LIS3DH  [LGA-16-3X3]  102.62,45.09 90 top
U2X12  LIS3DH  [LGA-16-3X3]  36.96,110.74 270 top
U2X21  LIS3DH  [LGA-16-3X3]  36.96,45.09 90 top
U2X22  LIS3DH  [LGA-16-3X3]  102.62,110.74 270 top
U3  SP485  [SO08]  77.22,45.09 180 top
U3X12  SP485  [SO08]  62.36,110.74 0 top
U3X21  SP485  [SO08]  11.56,45.09 180 top
U3X22  SP485  [SO08]  128.02,110.74 0 top
X1  RJ45-8P8C-8L-B  [RJ45-SHIELD-DS1128-S80BP]  81.66,23.5 160 bottom
X1X12  RJ45-8P8C-8L-B  [RJ45-SHIELD-DS1128-S80BP]  57.91,132.33 340 bottom
X1X21  RJ45-8P8C-8L-B  [RJ45-SHIELD-DS1128-S80BP]  16,23.5 160 bottom
X1X22  RJ45-8P8C-8L-B  [RJ45-SHIELD-DS1128-S80BP]  123.57,132.33 340 bottom
X3  RJ45-8P8C-8L-B  [RJ45-SHIELD-DS1128-S80BP]  123.57,23.5 200 bottom
X3X12  RJ45-8P8C-8L-B  [RJ45-SHIELD-DS1128-S80BP]  16,132.33 20 bottom
X3X21  RJ45-8P8C-8L-B  [RJ45-SHIELD-DS1128-S80BP]  57.91,23.5 200 bottom
X3X22  RJ45-8P8C-8L-B  [RJ45-SHIELD-DS1128-S80BP]  81.66,132.33 20 bottom
Y1  16MHz  [RESONATOR-SMD-3.2X1.3]  131.83,65.15 90 top
Y1X12  16MHz  [RESONATOR-SMD-3.2X1.3]  7.75,90.68 270 top
Y1X21  16MHz  [RESONATOR-SMD-3.2X1.3]  66.17,65.15 90 top
Y1X22  16MHz  [RESONATOR-SMD-3.2X1.3]  73.41,90.68 270 top

## Library data of the parts
C1 C3-C5 C7-C10 C14-C26 = resistor; LCSC: C29926
C1X12 C1X21 C1X22 C2X12 C2X21 C2X22 C3X12 C3X21 C3X22 C4X12 C4X21 C4X22 C5X12 C5X21 C5X22 C6X12 C6X21 C6X22 C7X12 C7X21 C7X22 C8X12 C8X21 C8X22 C9X12 C9X21 C9X22 C10X12 C10X21 C10X22 C12X12 C12X21 C12X22 C14X12 C14X21 C14X22 C15X12 C15X21 C15X22 C16X12 C16X21 C16X22 C17X12 C17X21 C17X22 C18X12 C18X21 C18X22 C19X12 C19X21 C19X22 C20X12 C20X21 C20X22 C21X12 C21X21 C21X22 C22X12 C22X21 C22X22 C23X12 C23X21 C23X22 C24X12 C24X21 C24X22 C25X12 C25X21 C25X22 C26X12 C26X21 C26X22 C36X12 C36X21 C36X22 C38X12 C38X21 C38X22 R1X12 R1X21 R1X22 R2 R2X12 R2X21 R2X22 R3 R3X12 R3X21 R3X22 R4 R4X12 R4X21 R4X22 R5X12 R5X21 R5X22 R6X12 R6X21 R6X22 R7X12 R7X21 R7X22 R8X12 R8X21 R8X22 R9X12 R9X21 R9X22 R10X12 R10X21 R10X22 R11 R11X12 R11X21 R11X22 R12X12 R12X21 R12X22 R13X12 R13X21 R13X22 R14X12 R14X21 R14X22 R15X12 R15X21 R15X22 R16X12 R16X21 R16X22 R17X12 R17X21 R17X22 = resistor
C2 C6 C12 C38 = resistor; LCSC: C92341
C13 C27-C35 = SparkFun-Capacitors; LCSC: C91151; PROD_ID: CAP-10057
C13X12 C13X21 C13X22 C27X12 C27X21 C27X22 C28X12 C28X21 C28X22 C29X12 C29X21 C29X22 C30X12 C30X21 C30X22 C31X12 C31X21 C31X22 C32X12 C32X21 C32X22 C33X12 C33X21 C33X22 C34X12 C34X21 C34X22 C35X12 C35X21 C35X22 = SparkFun-Capacitors
C36 = resistor; LCSC: C152846
D1-D6 = adafruit; LCSC: C64885
D1X12 D1X21 D1X22 D2X12 D2X21 D2X22 D3X12 D3X21 D3X22 D4X12 D4X21 D4X22 D5X12 D5X21 D5X22 D6X12 D6X21 D6X22 = adafruit
D7-D18 = SparkFun-LED; LCSC: C114585; PROD_ID: DIO-12503
D7X12 D7X21 D7X22 D8X12 D8X21 D8X22 D9X12 D9X21 D9X22 D10X12 D10X21 D10X22 D11X12 D11X21 D11X22 D12X12 D12X21 D12X22 D13X12 D13X21 D13X22 D14X12 D14X21 D14X22 D15X12 D15X21 D15X22 D16X12 D16X21 D16X22 D17X12 D17X21 D17X22 D18X12 D18X21 D18X22 = SparkFun-LED
D20 = diode; LCSC: C134445
D20X12 D20X21 D20X22 = diode
E$1-E$4 = SparkFun-Aesthetics
IC1 = linear; LCSC: C5446
IC1X12 IC1X21 IC1X22 = linear
IC2 = misc; LCSC: C93647
IC2X12 IC2X21 IC2X22 L1X12 L1X21 L1X22 = misc
J1 J1X12 J1X21 J1X22 J2X12 J2X21 J2X22 J3 J3X12 J3X21 J3X22 J4 J4X12 J4X21 J4X22 J5 J5X12 J5X21 J5X22 J6 J6X12 J6X21 J6X22 = SparkFun-Connectors
J2 = SparkFun-Connectors; PROD_ID: CONN-08971
L1 = misc; LCSC: C136211
PAD1 PAD1X12 PAD1X21 PAD1X22 PAD2 PAD2X12 PAD2X21 PAD2X22 PAD3 PAD3X12 PAD3X21 PAD3X22 PAD4 PAD4X12 PAD4X21 PAD4X22 PAD5 PAD5X12 PAD5X21 PAD5X22 = wirepad
Q1-Q3 = SparkFun-DiscreteSemi; PROD_ID: TRANS-12988
Q1X12 Q1X21 Q1X22 Q2X12 Q2X21 Q2X22 Q3X12 Q3X21 Q3X22 = SparkFun-DiscreteSemi
R1 R5-R7 R14 = resistor; LCSC: C17414
R8 = resistor; LCSC: C96346
R9 = resistor; LCSC: C170839
R10 = resistor; LCSC: C104303
R12 R13 = resistor; LCSC: C115316
R15 = resistor; LCSC: C144583
R16 = resistor; LCSC: C17539
R17 = resistor; LCSC: C104013
U1 = SparkFun-IC-Microcontroller; LCSC: C14877; PROD_ID: IC-09069
U1X12 U1X21 U1X22 = SparkFun-IC-Microcontroller
U2 = SparkFun-Sensors; LCSC: C15134; PROD_ID: IC-13419; SF_ID: N/A
U2X12 U2X21 U2X22 = SparkFun-Sensors
U3 = SparkFun-IC-Comms; LCSC: C6855; PROD_ID: IC-09388
U3X12 U3X21 U3X22 = SparkFun-IC-Comms
X1 X3 = myownParts; LCSC: C86586; MF: TYCO ELECTRONICS; MPN: RJ45-8L-B; OC_FARNELL: 1279843; OC_NEWARK: 52K4445
X1X12 X1X21 X1X22 X3X12 X3X21 X3X22 = myownParts
Y1 = SparkFun-Clocks; LCSC: C91584; PROD_ID: XTAL-08900
Y1X12 Y1X21 Y1X22 = SparkFun-Clocks

## Nets
+3V3: C6.1 C7.1 C9.1 IC1.2 R5.2 R6.2 R7.2 U2.1 U2.14
+3V3X12: C6X12.1 C7X12.1 C9X12.1 IC1X12.2 R5X12.2 R6X12.2 R7X12.2 U2X12.1 U2X12.14
+3V3X21: C6X21.1 C7X21.1 C9X21.1 IC1X21.2 R5X21.2 R6X21.2 R7X21.2 U2X21.1 U2X21.14
+3V3X22: C6X22.1 C7X22.1 C9X22.1 IC1X22.2 R5X22.2 R6X22.2 R7X22.2 U2X22.1 U2X22.14
+5V: C2.1 C3.1 C4.1 C8.1 C12.1 C14.1 C15.1 C16.1 C17.1 C18.1 C19.1 C20.1 C21.1 C22.1 C23.1 C24.1 C25.1 C26.1 C38.1 D7.1 D8.1 D9.1 D10.1 D11.1 D12.1 D13.1 D14.1 D15.1 D16.1 D17.1 D18.1 IC1.3 J1.2 J2.4 J6.1 L1.P$2 R1.2 R9.2 R14.2 U1.4 U1.6 U1.18 U3.8
+5VX12: C2X12.1 C3X12.1 C4X12.1 C8X12.1 C12X12.1 C14X12.1 C15X12.1 C16X12.1 C17X12.1 C18X12.1 C19X12.1 C20X12.1 C21X12.1 C22X12.1 C23X12.1 C24X12.1 C25X12.1 C26X12.1 C38X12.1 D7X12.1 D8X12.1 D9X12.1 D10X12.1 D11X12.1 D12X12.1 D13X12.1 D14X12.1 D15X12.1 D16X12.1 D17X12.1 D18X12.1 IC1X12.3 J1X12.2 J2X12.4 J6X12.1 L1X12.P$2 R1X12.2 R9X12.2 R14X12.2 U1X12.4 U1X12.6 U1X12.18 U3X12.8
+5VX21: C2X21.1 C3X21.1 C4X21.1 C8X21.1 C12X21.1 C14X21.1 C15X21.1 C16X21.1 C17X21.1 C18X21.1 C19X21.1 C20X21.1 C21X21.1 C22X21.1 C23X21.1 C24X21.1 C25X21.1 C26X21.1 C38X21.1 D7X21.1 D8X21.1 D9X21.1 D10X21.1 D11X21.1 D12X21.1 D13X21.1 D14X21.1 D15X21.1 D16X21.1 D17X21.1 D18X21.1 IC1X21.3 J1X21.2 J2X21.4 J6X21.1 L1X21.P$2 R1X21.2 R9X21.2 R14X21.2 U1X21.4 U1X21.6 U1X21.18 U3X21.8
+5VX22: C2X22.1 C3X22.1 C4X22.1 C8X22.1 C12X22.1 C14X22.1 C15X22.1 C16X22.1 C17X22.1 C18X22.1 C19X22.1 C20X22.1 C21X22.1 C22X22.1 C23X22.1 C24X22.1 C25X22.1 C26X22.1 C38X22.1 D7X22.1 D8X22.1 D9X22.1 D10X22.1 D11X22.1 D12X22.1 D13X22.1 D14X22.1 D15X22.1 D16X22.1 D17X22.1 D18X22.1 IC1X22.3 J1X22.2 J2X22.4 J6X22.1 L1X22.P$2 R1X22.2 R9X22.2 R14X22.2 U1X22.4 U1X22.6 U1X22.18 U3X22.8
+24V: C13.1 C27.1 C28.1 C29.1 C30.1 C31.1 C32.1 C33.1 C34.1 C35.1 IC2.7 R8.2 X1.4 X1.5 X3.4 X3.5
+24VX12: C13X12.1 C27X12.1 C28X12.1 C29X12.1 C30X12.1 C31X12.1 C32X12.1 C33X12.1 C34X12.1 C35X12.1 IC2X12.7 R8X12.2 X1X12.4 X1X12.5 X3X12.4 X3X12.5
+24VX21: C13X21.1 C27X21.1 C28X21.1 C29X21.1 C30X21.1 C31X21.1 C32X21.1 C33X21.1 C34X21.1 C35X21.1 IC2X21.7 R8X21.2 X1X21.4 X1X21.5 X3X21.4 X3X21.5
+24VX22: C13X22.1 C27X22.1 C28X22.1 C29X22.1 C30X22.1 C31X22.1 C32X22.1 C33X22.1 C34X22.1 C35X22.1 IC2X22.7 R8X22.2 X1X22.4 X1X22.5 X3X22.4 X3X22.5
A0: U1.23
A1: U1.24
A2: U1.25
A3: D7.4 U1.26
A3X12: D7X12.4 U1X12.26
A3X21: D7X21.4 U1X21.26
A3X22: D7X22.4 U1X22.26
A4: PAD3.1 U1.27
A4X12: PAD3X12.1 U1X12.27
A4X21: PAD3X21.1 U1X21.27
A4X22: PAD3X22.1 U1X22.27
A5: PAD4.1 U1.28
A5X12: PAD4X12.1 U1X12.28
A5X21: PAD4X21.1 U1X21.28
A5X22: PAD4X22.1 U1X22.28
A6: U1.19
A7: U1.22
AREF: C5.2 U1.20
AREFX12: C5X12.2 U1X12.20
AREFX21: C5X21.2 U1X21.20
AREFX22: C5X22.2 U1X22.20
BST: C10.1 IC2.8
BSTX12: C10X12.1 IC2X12.8
BSTX21: C10X21.1 IC2X21.8
BSTX22: C10X22.1 IC2X22.8
COMP: C36.1 IC2.3
COMPX12: C36X12.1 IC2X12.3
COMPX21: C36X21.1 IC2X21.3
COMPX22: C36X22.1 IC2X22.3
D2: D5.C U1.32
D2X12: D5X12.C U1X12.32
D2X21: D5X21.C U1X21.32
D2X22: D5X22.C U1X22.32
D3: D6.C U1.1
D3X12: D6X12.C U1X12.1
D3X21: D6X21.C U1X21.1
D3X22: D6X22.C U1X22.1
D5: Q3.1 U1.9
D5X12: Q3X12.1 U1X12.9
D5X21: Q3X21.1 U1X21.9
D5X22: Q3X22.1 U1X22.9
D6: Q2.1 U1.10
D6X12: Q2X12.1 U1X12.10
D6X21: Q2X21.1 U1X21.10
D6X22: Q2X22.1 U1X22.10
D7: PAD1.1 U1.11
D7X12: PAD1X12.1 U1X12.11
D7X21: PAD1X21.1 U1X21.11
D7X22: PAD1X22.1 U1X22.11
D8: PAD2.1 U1.12
D8X12: PAD2X12.1 U1X12.12
D8X21: PAD2X21.1 U1X21.12
D8X22: PAD2X22.1 U1X22.12
D9: Q1.1 U1.13
D9X12: Q1X12.1 U1X12.13
D9X21: Q1X21.1 U1X21.13
D9X22: Q1X22.1 U1X22.13
DIR: U1.2 U3.2 U3.3
DIRX12: U1X12.2 U3X12.2 U3X12.3
DIRX21: U1X21.2 U3X21.2 U3X21.3
DIRX22: U1X22.2 U3X22.2 U3X22.3
EN: IC2.2 R8.1 R15.2
ENX12: IC2X12.2 R8X12.1 R15X12.2
ENX21: IC2X21.2 R8X21.1 R15X21.2
ENX22: IC2X22.2 R8X22.1 R15X22.2
FB: IC2.4 R9.1 R10.2
FBX12: IC2X12.4 R9X12.1 R10X12.2
FBX21: IC2X21.4 R9X21.1 R10X21.2
FBX22: IC2X22.4 R9X22.1 R10X22.2
FREQ: IC2.6 R16.2
FREQX12: IC2X12.6 R16X12.2
FREQX21: IC2X21.6 R16X21.2
FREQX22: IC2X22.6 R16X22.2
GND: C2.2 C3.2 C4.2 C5.1 C6.2 C7.2 C8.2 C9.2 C12.2 C13.2 C14.2 C15.2 C16.2 C17.2 C18.2 C19.2 C20.2 C21.2 C22.2 C23.2 C24.2 C25.2 C26.2 C27.2 C28.2 C29.2 C30.2 C31.2 C32.2 C33.2 C34.2 C35.2 C38.2 D7.3 D8.3 D9.3 D10.3 D11.3 D12.3 D13.3 D14.3 D15.3 D16.3 D17.3 D18.3 D20.A IC1.1 IC2.5 J1.6 J2.6 PAD5.1 Q1.2 Q2.2 Q3.2 R10.1 R15.1 R16.1 R17.1 U1.3 U1.5 U1.21 U2.5 U2.10 U2.12 U3.5 X1.3 X1.6 X1.7 X1.8 X3.3 X3.6 X3.7 X3.8 Y1.2
GNDX12: C2X12.2 C3X12.2 C4X12.2 C5X12.1 C6X12.2 C7X12.2 C8X12.2 C9X12.2 C12X12.2 C13X12.2 C14X12.2 C15X12.2 C16X12.2 C17X12.2 C18X12.2 C19X12.2 C20X12.2 C21X12.2 C22X12.2 C23X12.2 C24X12.2 C25X12.2 C26X12.2 C27X12.2 C28X12.2 C29X12.2 C30X12.2 C31X12.2 C32X12.2 C33X12.2 C34X12.2 C35X12.2 C38X12.2 D7X12.3 D8X12.3 D9X12.3 D10X12.3 D11X12.3 D12X12.3 D13X12.3 D14X12.3 D15X12.3 D16X12.3 D17X12.3 D18X12.3 D20X12.A IC1X12.1 IC2X12.5 J1X12.6 J2X12.6 PAD5X12.1 Q1X12.2 Q2X12.2 Q3X12.2 R10X12.1 R15X12.1 R16X12.1 R17X12.1 U1X12.3 U1X12.5 U1X12.21 U2X12.5 U2X12.10 U2X12.12 U3X12.5 X1X12.3 X1X12.6 X1X12.7 X1X12.8 X3X12.3 X3X12.6 X3X12.7 X3X12.8 Y1X12.2
GNDX21: C2X21.2 C3X21.2 C4X21.2 C5X21.1 C6X21.2 C7X21.2 C8X21.2 C9X21.2 C12X21.2 C13X21.2 C14X21.2 C15X21.2 C16X21.2 C17X21.2 C18X21.2 C19X21.2 C20X21.2 C21X21.2 C22X21.2 C23X21.2 C24X21.2 C25X21.2 C26X21.2 C27X21.2 C28X21.2 C29X21.2 C30X21.2 C31X21.2 C32X21.2 C33X21.2 C34X21.2 C35X21.2 C38X21.2 D7X21.3 D8X21.3 D9X21.3 D10X21.3 D11X21.3 D12X21.3 D13X21.3 D14X21.3 D15X21.3 D16X21.3 D17X21.3 D18X21.3 D20X21.A IC1X21.1 IC2X21.5 J1X21.6 J2X21.6 PAD5X21.1 Q1X21.2 Q2X21.2 Q3X21.2 R10X21.1 R15X21.1 R16X21.1 R17X21.1 U1X21.3 U1X21.5 U1X21.21 U2X21.5 U2X21.10 U2X21.12 U3X21.5 X1X21.3 X1X21.6 X1X21.7 X1X21.8 X3X21.3 X3X21.6 X3X21.7 X3X21.8 Y1X21.2
GNDX22: C2X22.2 C3X22.2 C4X22.2 C5X22.1 C6X22.2 C7X22.2 C8X22.2 C9X22.2 C12X22.2 C13X22.2 C14X22.2 C15X22.2 C16X22.2 C17X22.2 C18X22.2 C19X22.2 C20X22.2 C21X22.2 C22X22.2 C23X22.2 C24X22.2 C25X22.2 C26X22.2 C27X22.2 C28X22.2 C29X22.2 C30X22.2 C31X22.2 C32X22.2 C33X22.2 C34X22.2 C35X22.2 C38X22.2 D7X22.3 D8X22.3 D9X22.3 D10X22.3 D11X22.3 D12X22.3 D13X22.3 D14X22.3 D15X22.3 D16X22.3 D17X22.3 D18X22.3 D20X22.A IC1X22.1 IC2X22.5 J1X22.6 J2X22.6 PAD5X22.1 Q1X22.2 Q2X22.2 Q3X22.2 R10X22.1 R15X22.1 R16X22.1 R17X22.1 U1X22.3 U1X22.5 U1X22.21 U2X22.5 U2X22.10 U2X22.12 U3X22.5 X1X22.3 X1X22.6 X1X22.7 X1X22.8 X3X22.3 X3X22.6 X3X22.7 X3X22.8 Y1X22.2
INT1: D5.A U2.11
INT1X12: D5X12.A U2X12.11
INT1X21: D5X21.A U2X21.11
INT1X22: D5X22.A U2X22.11
INT2: D6.A U2.9
INT2X12: D6X12.A U2X12.9
INT2X21: D6X21.A U2X21.9
INT2X22: D6X22.A U2X22.9
MISO: D3.C J1.1 U1.16
MISO_3.3V: D3.A U2.7
MISO_3.3VX12: D3X12.A U2X12.7
MISO_3.3VX21: D3X21.A U2X21.7
MISO_3.3VX22: D3X22.A U2X22.7
MISOX12: D3X12.C J1X12.1 U1X12.16
MISOX21: D3X21.C J1X21.1 U1X21.16
MISOX22: D3X22.C J1X22.1 U1X22.16
MOSI: D2.C J1.4 U1.15
MOSI_3.3V: D2.A R6.1 U2.6
MOSI_3.3VX12: D2X12.A R6X12.1 U2X12.6
MOSI_3.3VX21: D2X21.A R6X21.1 U2X21.6
MOSI_3.3VX22: D2X22.A R6X22.1 U2X22.6
MOSIX12: D2X12.C J1X12.4 U1X12.15
MOSIX21: D2X21.C J1X21.4 U1X21.15
MOSIX22: D2X22.C J1X22.4 U1X22.15
N$1: Q1.3 R2.1
N$1X12: Q1X12.3 R2X12.1
N$1X21: Q1X21.3 R2X21.1
N$1X22: Q1X22.3 R2X22.1
N$2: D7.2 D8.4
N$2X12: D7X12.2 D8X12.4
N$2X21: D7X21.2 D8X21.4
N$2X22: D7X22.2 D8X22.4
N$3: D8.2 D9.4
N$3X12: D8X12.2 D9X12.4
N$3X21: D8X21.2 D9X21.4
N$3X22: D8X22.2 D9X22.4
N$4: J3.1 R2.2
N$4X12: J3X12.1 R2X12.2
N$4X21: J3X21.1 R2X21.2
N$4X22: J3X22.1 R2X22.2
N$5: Q2.3 R3.1
N$5X12: Q2X12.3 R3X12.1
N$5X21: Q2X21.3 R3X21.1
N$5X22: Q2X22.3 R3X22.1
N$6: J4.1 R3.2
N$6X12: J4X12.1 R3X12.2
N$6X21: J4X21.1 R3X21.2
N$6X22: J4X22.1 R3X22.2
N$7: Q3.3 R4.1
N$7X12: Q3X12.3 R4X12.1
N$7X21: Q3X21.3 R4X21.1
N$7X22: Q3X22.3 R4X22.1
N$8: J5.1 R4.2
N$8X12: J5X12.1 R4X12.2
N$8X21: J5X21.1 R4X21.2
N$8X22: J5X22.1 R4X22.2
N$9: D9.2 D10.4
N$9X12: D9X12.2 D10X12.4
N$9X21: D9X21.2 D10X21.4
N$9X22: D9X22.2 D10X22.4
N$10: D10.2 D11.4
N$10X12: D10X12.2 D11X12.4
N$10X21: D10X21.2 D11X21.4
N$10X22: D10X22.2 D11X22.4
N$11: D11.2 D12.4
N$11X12: D11X12.2 D12X12.4
N$11X21: D11X21.2 D12X21.4
N$11X22: D11X22.2 D12X22.4
N$12: D12.2 D13.4
N$12X12: D12X12.2 D13X12.4
N$12X21: D12X21.2 D13X21.4
N$12X22: D12X22.2 D13X22.4
N$13: D13.2 D14.4
N$13X12: D13X12.2 D14X12.4
N$13X21: D13X21.2 D14X21.4
N$13X22: D13X22.2 D14X22.4
N$14: D14.2 D15.4
N$14X12: D14X12.2 D15X12.4
N$14X21: D14X21.2 D15X21.4
N$14X22: D14X22.2 D15X22.4
N$15: D15.2 D16.4
N$15X12: D15X12.2 D16X12.4
N$15X21: D15X21.2 D16X21.4
N$15X22: D15X22.2 D16X22.4
N$16: D16.2 D17.4
N$16X12: D16X12.2 D17X12.4
N$16X21: D16X21.2 D17X21.4
N$16X22: D16X22.2 D17X22.4
N$17: D17.2 D18.4
N$17X12: D17X12.2 D18X12.4
N$17X21: D17X21.2 D18X21.4
N$17X22: D17X22.2 D18X22.4
N$25: C36.2 R17.2
N$25X12: C36X12.2 R17X12.2
N$25X21: C36X21.2 R17X21.2
N$25X22: C36X22.2 R17X22.2
N$30: R12.2 U3.1
N$30X12: R12X12.2 U3X12.1
N$30X21: R12X21.2 U3X21.1
N$30X22: R12X22.2 U3X22.1
N$31: R13.2 U3.4
N$31X12: R13X12.2 U3X12.4
N$31X21: R13X21.2 U3X21.4
N$31X22: R13X22.2 U3X22.4
RESET: C1.2 J1.5 R1.1 U1.29
RESET_EXT: C1.1 J2.1
RESET_EXTX12: C1X12.1 J2X12.1
RESET_EXTX21: C1X21.1 J2X21.1
RESET_EXTX22: C1X22.1 J2X22.1
RESETX12: C1X12.2 J1X12.5 R1X12.1 U1X12.29
RESETX21: C1X21.2 J1X21.5 R1X21.1 U1X21.29
RESETX22: C1X22.2 J1X22.5 R1X22.1 U1X22.29
RS485A: R11.1 U3.6 X1.2 X3.2
RS485AX12: R11X12.1 U3X12.6 X1X12.2 X3X12.2
RS485AX21: R11X21.1 U3X21.6 X1X21.2 X3X21.2
RS485AX22: R11X22.1 U3X22.6 X1X22.2 X3X22.2
RS485B: R11.2 U3.7 X1.1 X3.1
RS485BX12: R11X12.2 U3X12.7 X1X12.1 X3X12.1
RS485BX21: R11X21.2 U3X21.7 X1X21.1 X3X21.1
RS485BX22: R11X22.2 U3X22.7 X1X22.1 X3X22.1
RX: J2.3 R12.1 R14.1 U1.30
RXX12: J2X12.3 R12X12.1 R14X12.1 U1X12.30
RXX21: J2X21.3 R12X21.1 R14X21.1 U1X21.30
RXX22: J2X22.3 R12X22.1 R14X22.1 U1X22.30
SCK: D4.C J1.3 U1.17
SCK_3.3V: D4.A R7.1 U2.4
SCK_3.3VX12: D4X12.A R7X12.1 U2X12.4
SCK_3.3VX21: D4X21.A R7X21.1 U2X21.4
SCK_3.3VX22: D4X22.A R7X22.1 U2X22.4
SCKX12: D4X12.C J1X12.3 U1X12.17
SCKX21: D4X21.C J1X21.3 U1X21.17
SCKX22: D4X22.C J1X22.3 U1X22.17
SS: D1.C U1.14
SS_3.3V: D1.A R5.1 U2.8
SS_3.3VX12: D1X12.A R5X12.1 U2X12.8
SS_3.3VX21: D1X21.A R5X21.1 U2X21.8
SS_3.3VX22: D1X22.A R5X22.1 U2X22.8
SSX12: D1X12.C U1X12.14
SSX21: D1X21.C U1X21.14
SSX22: D1X22.C U1X22.14
SW: C10.2 D20.C IC2.1 L1.P$1
SWX12: C10X12.2 D20X12.C IC2X12.1 L1X12.P$1
SWX21: C10X21.2 D20X21.C IC2X21.1 L1X21.P$1
SWX22: C10X22.2 D20X22.C IC2X22.1 L1X22.P$1
TX: J2.2 R13.1 U1.31
TXX12: J2X12.2 R13X12.1 U1X12.31
TXX21: J2X21.2 R13X21.1 U1X21.31
TXX22: J2X22.2 R13X22.1 U1X22.31
XTAL1: U1.7 Y1.1
XTAL1X12: U1X12.7 Y1X12.1
XTAL1X21: U1X21.7 Y1X21.1
XTAL1X22: U1X22.7 Y1X22.1
XTAL2: U1.8 Y1.3
XTAL2X12: U1X12.8 Y1X12.3
XTAL2X21: U1X21.8 Y1X21.3
XTAL2X22: U1X22.8 Y1X22.3

## Tracks (layer width: path | path; a pad name or v marks a point on that pad's centre or on a via)
+3V3  (via drill 0.35)
  Top 0.254: IC1.2 126.1,41.55 C9.1 122.19,41.55 v122.17,41.53 122.17,44.83 123.19,45.85 124.97,45.85 125.8,46.67 R5.2 R6.2 R7.2 | 101.47,40.89 101.6,40.77 C7.1 101.6,40.75 v101.6,39.24 | 101.47,40.89 99.31,43.05 99.31,45.59 | 99.31,45.59 98.81,46.1 98.06,46.1 C6.1 | U2.14 99.32,45.59 99.31,45.59 | U2.1 101.62,41.04 101.47,40.89
  Bottom 0.254: v101.6,39.24 105.66,39.24 106.17,39.75 106.17,42.55 109.47,45.85 120.9,45.85 122.17,44.58 v122.17,41.53
+3V3X12  (via drill 0.35 pad 0.76)  (9 unrouted)
  Top 0.254: IC1X12.2 13.47,114.28 17.38,114.28 v17.4,114.3 17.4,111 16.38,109.98 14.61,109.98 13.78,109.15 R7X12.2 | 38.1,114.94 37.97,115.06 C7X12.1 37.97,115.08 v37.97,116.59 | 38.1,114.94 40.26,112.78 40.26,110.24 | 40.26,110.24 40.77,109.73 41.51,109.73 C6X12.1 | U2X12.14 40.25,110.24 40.26,110.24 | U2X12.1 37.96,114.79 38.1,114.94
  Bottom 0.254: v37.97,116.59 33.91,116.59 33.4,116.08 33.4,113.28 30.1,109.98 18.67,109.98 17.4,111.25 v17.4,114.3
+3V3X21  (via drill 0.35 pad 0.76)  (9 unrouted)
  Top 0.254: IC1X21.2 60.45,41.55 56.53,41.55 v56.52,41.53 56.52,44.83 57.53,45.85 59.31,45.85 60.14,46.67 R7X21.2 | 35.81,40.89 35.94,40.77 C7X21.1 35.94,40.75 v35.94,39.24 | 35.81,40.89 33.66,43.05 33.66,45.59 | 33.66,45.59 33.15,46.1 32.4,46.1 C6X21.1 | U2X21.14 33.66,45.59 | U2X21.1 35.96,41.04 35.81,40.89
  Bottom 0.254: v35.94,39.24 40.01,39.24 40.51,39.75 40.51,42.55 43.81,45.85 55.24,45.85 56.52,44.58 v56.52,41.53
+3V3X22  (via drill 0.35 pad 0.76)  (9 unrouted)
  Top 0.254: IC1X22.2 79.13,114.28 83.04,114.28 v83.06,114.3 83.06,111 82.04,109.98 80.26,109.98 79.44,109.15 R7X22.2 | 103.76,114.94 103.63,115.06 C7X22.1 103.63,115.08 v103.63,116.59 | 103.76,114.94 105.92,112.78 105.92,110.24 | 105.92,110.24 106.43,109.73 107.17,109.73 C6X22.1 | U2X22.14 105.91,110.24 105.92,110.24 | U2X22.1 103.62,114.79 103.76,114.94
  Bottom 0.254: v103.63,116.59 99.57,116.59 99.06,116.08 99.06,113.28 95.76,109.98 84.33,109.98 83.06,111.25 v83.06,114.3
+5V  (via drill 0.35)  (19 unrouted)
  Top 0.254: C8.1 129.35,41.55 IC1.3 | U1.6 127.43,65.15 127,65.15 126.87,65.02 | 126.87,65.02 126.24,64.39 126.24,64.14 126.96,63.41 U1.4 128.72,61.59 C3.1 C4.1 | 126.87,65.02 123.19,68.71 123.19,70.52 U1.18 121.19,72.52 v117.86,72.52 C2.1 | v112.78,71.25 111,71.25 J1.2 110.93,69.79 R1.2 | C8.1 130.81,41.02 | D13.1 C20.1 | D14.1 C21.1 | D16.1 C23.1 | D17.1 C24.1 105.92,53 | C25.1 D18.1 | C22.1 D15.1 | D8.1 C15.1 | D9.1 107.7,38.12 | D10.1 C17.1 | D11.1 C18.1 | D12.1 C19.1 | C8.1 131.84,41.55 132.33,42.04 132.33,44.32 v131.83,44.83 | D7.1 112.11,46.69 C14.1 | 109.47,43.05 110.49,43.05 110.74,42.8 111.51,42.8 112.52,41.78 v115.57,41.78 | v118.87,41.78 121.16,39.5 v132.33,39.5 | v83.57,38.48 82.06,38.48 C26.1 82.04,36.96 86.11,32.89 v89.15,32.89 | v79.25,40.77 79.12,40.89 U3.8 | J6.1 88.14,69.47 85.38,66.71 84.89,66.71 J2.4 87.56,66.67 R14.2 | v95,3.43 95,15.11 95.5,15.62 v96.52,15.62 | v124.46,6.99 R9.2
  Top 0.508: C4.1 v127.76,59.31 | 104.14,37.97 103.62,37.45 C17.1 | 104.14,37.97 105.41,39.24 106.93,39.24 | 106.93,39.24 107.7,38.48 107.7,38.12 C16.1 | 106.93,39.24 107.95,40.26 107.95,41.27 108.71,42.04 109.47,42.04 | 109.47,45.09 110.49,46.1 C14.1 | 109.47,45.09 109.47,47.37 108.97,47.88 108.97,49.4 | 108.97,49.4 108.97,49.55 107.8,49.55 105.92,51.44 105.92,53 | 100.33,37.97 104.14,37.97 | 100.33,37.97 100.12,37.97 C18.1 | 96.77,39.77 98.53,39.77 100.33,37.97 | 96.77,39.77 96.77,42.8 95.63,43.94 | 95.63,43.94 95.49,44.09 C20.1 | 95.63,43.94 95.63,47.75 | 95.63,47.75 97.54,49.66 97.54,51.44 | 97.54,51.44 97.54,52.05 | C19.1 96.77,39.77 | C21.1 95.63,47.75 | 97.54,51.44 C22.1 97.54,51.18 99.57,51.18 101.6,53.21 101.6,53.96 C23.1 | 108.97,49.4 C25.1 | C15.1 110.51,41.51 109.98,42.04 109.47,42.04 | 109.47,42.04 109.47,43.05 109.47,45.09 | v96.01,26.54 95.76,26.54 | 95.76,26.54 94.74,26.54 92.71,28.57 91.19,28.57 90.42,29.34 90.42,31.62 v89.15,32.89 | C38.1 v96.52,15.62 | C12.1 97.81,24.5 95.76,26.54
  Top 0.762: 96.9,14.72 C38.1 C12.1
  Top 1.524: L1.P$2 96.9,14.72
  Bottom 0.254: v117.86,72.52 114.05,72.52 v112.78,71.25 | v131.83,44.83 132.33,44.83 | v115.57,41.78 v118.87,41.78 | v83.57,38.48 81.28,40.77 v79.25,40.77 | v95,3.43 115.57,3.43 119.13,6.99 v124.46,6.99
  Bottom 0.508: J6.1 88.39,70.74 101.72,70.74 104.51,67.94 113.28,67.94 115.32,69.98 124.71,69.98 130.56,64.14 130.56,62.1 v127.76,59.31 124.97,56.52 124.97,55.5 125.98,54.48 130.56,54.48 132.33,52.7 132.33,44.83 v132.33,39.5 129.29,36.45 111.76,36.45 107.19,31.88 90.17,31.88 v89.15,32.89
+5VX12  (via drill 0.35 pad 0.76)  (40 unrouted)
  Top 0.254: C8X12.1 10.22,114.28 IC1X12.3 | U1X12.6 12.15,90.68 12.57,90.68 12.7,90.81 | 12.7,90.81 13.34,91.44 13.34,91.69 12.62,92.41 U1X12.4 10.85,94.23 C3X12.1 C4X12.1 | 12.7,90.81 16.38,87.12 16.38,85.31 U1X12.18 18.38,83.31 v21.72,83.31 C2X12.1 | v26.8,84.58 28.57,84.58 J1X12.2 28.64,86.04 R1X12.2 | C8X12.1 8.76,114.81 | D13X12.1 C20X12.1 | D14X12.1 C21X12.1 | D16X12.1 C23X12.1 | D17X12.1 C24X12.1 33.66,102.83 | C25X12.1 D18X12.1 | C22X12.1 D15X12.1 | D8X12.1 C15X12.1 | D9X12.1 31.88,117.71 | D10X12.1 C17X12.1 | D11X12.1 C18X12.1 | D12X12.1 C19X12.1 | C8X12.1 7.73,114.28 7.24,113.79 7.24,111.51 v7.75,111 | D7X12.1 27.47,109.14 C14X12.1 | 30.1,112.78 29.08,112.78 28.83,113.03 28.07,113.03 27.05,114.05 v24,114.05 | v20.7,114.05 18.41,116.33 v7.24,116.33 | v56.01,117.35 57.52,117.35 C26X12.1 57.53,118.87 53.47,122.94 v50.42,122.94 | v60.33,115.06 60.45,114.94 U3X12.8 | J6X12.1 51.44,86.36 54.19,89.12 54.68,89.12 J2X12.4 52.01,89.15 R14X12.2 | v44.58,152.4 44.58,140.72 44.07,140.21 v43.05,140.21 | v15.11,148.84 R9X12.2
  Top 0.508: C4X12.1 v11.81,96.52 | 42.04,104.65 40.01,104.65 37.97,102.62 37.97,101.87 C23X12.1 | 35.43,117.86 35.96,118.38 C17X12.1 | 35.43,117.86 34.16,116.59 32.64,116.59 | 32.64,116.59 31.88,117.35 31.88,117.71 C16X12.1 | 32.64,116.59 31.62,115.57 31.62,114.55 30.86,113.79 30.1,113.79 | 30.1,110.74 29.08,109.73 C14X12.1 | 30.1,110.74 30.1,108.46 30.61,107.95 30.61,106.43 | 30.61,106.43 30.61,106.28 31.77,106.28 33.66,104.39 33.66,102.83 | 39.24,117.86 39.45,117.86 C18X12.1 | 39.24,117.86 35.43,117.86 | 42.8,116.06 41.04,116.06 39.24,117.86 | 42.8,116.06 42.8,113.03 43.94,111.89 | 43.94,111.89 44.09,111.74 C20X12.1 | 43.94,111.89 43.94,108.08 | 43.94,108.08 42.04,106.17 42.04,104.65 | 42.04,103.78 42.04,104.39 | 42.04,104.39 42.04,104.65 | C19X12.1 42.8,116.06 | C21X12.1 43.94,108.08 | 42.04,104.39 C22X12.1 42.04,104.65 | 30.61,106.43 C25X12.1 | C15X12.1 29.06,114.32 29.59,113.79 30.1,113.79 | 30.1,113.79 30.1,112.78 30.1,110.74 | v43.56,129.29 43.81,129.29 | 43.81,129.29 44.83,129.29 46.86,127.25 48.39,127.25 49.15,126.49 49.15,124.21 v50.42,122.94 | C38X12.1 v43.05,140.21 | C12X12.1 41.77,131.33 43.81,129.29
  Top 0.762: 42.67,141.11 C38X12.1 C12X12.1
  Top 1.524: L1X12.P$2 42.67,141.11
  Bottom 0.254: v21.72,83.31 25.53,83.31 v26.8,84.58 | v7.75,111 7.24,111 | v24,114.05 v20.7,114.05 | v56.01,117.35 58.29,115.06 v60.33,115.06 | v44.58,152.4 24,152.4 20.45,148.84 v15.11,148.84
  Bottom 0.508: J6X12.1 51.18,85.09 37.86,85.09 35.06,87.88 26.29,87.88 24.26,85.85 14.86,85.85 9.02,91.69 9.02,93.73 v11.81,96.52 14.61,99.31 14.61,100.33 13.59,101.35 9.02,101.35 7.24,103.12 7.24,111 v7.24,116.33 10.29,119.38 27.81,119.38 32.38,123.95 49.4,123.95 v50.42,122.94
+5VX21  (via drill 0.35 pad 0.76)  (40 unrouted)
  Top 0.254: C8X21.1 63.7,41.55 IC1X21.3 | U1X21.6 61.77,65.15 61.34,65.15 61.21,65.02 | 61.21,65.02 60.58,64.39 60.58,64.14 61.3,63.41 U1X21.4 63.06,61.59 C3X21.1 C4X21.1 | 61.21,65.02 57.53,68.71 57.53,70.52 U1X21.18 55.53,72.52 v52.2,72.52 C2X21.1 | v47.12,71.25 45.34,71.25 J1X21.2 45.27,69.79 R1X21.2 | C8X21.1 65.15,41.02 | D13X21.1 C20X21.1 | D14X21.1 C21X21.1 | D16X21.1 C23X21.1 | D17X21.1 C24X21.1 40.26,53 | C25X21.1 D18X21.1 | C22X21.1 D15X21.1 | D8X21.1 C15X21.1 | D9X21.1 42.04,38.12 | D10X21.1 C17X21.1 | D11X21.1 C18X21.1 | D12X21.1 C19X21.1 | C8X21.1 66.18,41.55 66.67,42.04 66.67,44.32 v66.17,44.83 | D7X21.1 46.45,46.69 C14X21.1 | 43.81,43.05 44.83,43.05 45.09,42.8 45.85,42.8 46.86,41.78 v49.91,41.78 | v53.21,41.78 55.5,39.5 v66.67,39.5 | v17.91,38.48 16.4,38.48 C26X21.1 16.38,36.96 20.45,32.89 v23.5,32.89 | v13.59,40.77 13.46,40.89 U3X21.8 | J6X21.1 22.48,69.47 19.72,66.71 19.24,66.71 J2X21.4 21.91,66.67 R14X21.2 | v29.34,3.43 29.34,15.11 29.85,15.62 v30.86,15.62 | v58.8,6.99 R9X21.2
  Top 0.508: C4X21.1 v62.1,59.31 | 31.88,51.18 33.91,51.18 35.94,53.21 35.94,53.96 C23X21.1 | 38.48,37.97 37.96,37.45 C17X21.1 | 38.48,37.97 39.75,39.24 41.27,39.24 | 41.27,39.24 42.04,38.48 42.04,38.12 C16X21.1 | 41.27,39.24 42.29,40.26 42.29,41.27 43.05,42.04 43.81,42.04 | 43.81,45.09 44.83,46.1 C14X21.1 | 43.81,45.09 43.81,47.37 43.31,47.88 43.31,49.4 | 43.31,49.4 43.31,49.55 42.14,49.55 40.26,51.44 40.26,53 | 34.67,37.97 34.46,37.97 C18X21.1 | 34.67,37.97 38.48,37.97 | 31.12,39.77 32.87,39.77 34.67,37.97 | 31.12,39.77 31.12,42.8 29.97,43.94 | 29.97,43.94 29.83,44.09 C20X21.1 | 29.97,43.94 29.97,47.75 | 29.97,47.75 31.88,49.66 31.88,51.18 | 31.88,52.05 31.88,51.44 | 31.88,51.44 31.88,51.18 | C19X21.1 31.12,39.77 | C21X21.1 29.97,47.75 | 31.88,51.44 C22X21.1 31.88,51.18 | 43.31,49.4 C25X21.1 | C15X21.1 44.85,41.51 44.32,42.04 43.81,42.04 | 43.81,42.04 43.81,43.05 43.81,45.09 | v30.35,26.54 30.1,26.54 | 30.1,26.54 29.08,26.54 27.05,28.57 25.53,28.57 24.77,29.34 24.77,31.62 v23.5,32.89 | C38X21.1 v30.86,15.62 | C12X21.1 32.15,24.5 30.1,26.54
  Top 0.762: 31.24,14.72 C38X21.1 C12X21.1
  Top 1.524: L1X21.P$2 31.24,14.72
  Bottom 0.254: v52.2,72.52 48.39,72.52 v47.12,71.25 | v66.17,44.83 66.67,44.83 | v49.91,41.78 v53.21,41.78 | v17.91,38.48 15.62,40.77 v13.59,40.77 | v29.34,3.43 49.91,3.43 53.47,6.99 v58.8,6.99
  Bottom 0.508: J6X21.1 22.73,70.74 36.06,70.74 38.85,67.94 47.62,67.94 49.66,69.98 59.05,69.98 64.9,64.14 64.9,62.1 v62.1,59.31 59.31,56.52 59.31,55.5 60.33,54.48 64.9,54.48 66.67,52.7 66.67,44.83 v66.67,39.5 63.63,36.45 46.1,36.45 41.53,31.88 24.51,31.88 v23.5,32.89
+5VX22  (via drill 0.35 pad 0.76)  (40 unrouted)
  Top 0.254: C8X22.1 75.88,114.28 IC1X22.3 | U1X22.6 77.8,90.68 78.23,90.68 78.36,90.81 | 78.36,90.81 78.99,91.44 78.99,91.69 78.27,92.41 U1X22.4 76.51,94.23 C3X22.1 C4X22.1 | 78.36,90.81 82.04,87.12 82.04,85.31 U1X22.18 84.04,83.31 v87.38,83.31 C2X22.1 | v92.46,84.58 94.23,84.58 J1X22.2 94.3,86.04 R1X22.2 | C8X22.1 74.42,114.81 | D13X22.1 C20X22.1 | D14X22.1 C21X22.1 | D16X22.1 C23X22.1 | D17X22.1 C24X22.1 99.31,102.83 | C25X22.1 D18X22.1 | C22X22.1 D15X22.1 | D8X22.1 C15X22.1 | D9X22.1 97.54,117.71 | D10X22.1 C17X22.1 | D11X22.1 C18X22.1 | D12X22.1 C19X22.1 | C8X22.1 73.39,114.28 72.9,113.79 72.9,111.51 v73.41,111 | D7X22.1 93.13,109.14 C14X22.1 | 95.76,112.78 94.74,112.78 94.49,113.03 93.73,113.03 92.71,114.05 v89.66,114.05 | v86.36,114.05 84.07,116.33 v72.9,116.33 | v121.67,117.35 123.17,117.35 C26X22.1 123.19,118.87 119.13,122.94 v116.08,122.94 | v125.98,115.06 126.11,114.94 U3X22.8 | J6X22.1 117.09,86.36 119.85,89.12 120.34,89.12 J2X22.4 117.67,89.15 R14X22.2 | v110.24,152.4 110.24,140.72 109.73,140.21 v108.71,140.21 | v80.77,148.84 R9X22.2
  Top 0.508: C4X22.1 v77.47,96.52 | 107.7,104.65 105.66,104.65 103.63,102.62 103.63,101.87 C23X22.1 | 101.09,117.86 101.62,118.38 C17X22.1 | 101.09,117.86 99.82,116.59 98.3,116.59 | 98.3,116.59 97.54,117.35 97.54,117.71 C16X22.1 | 98.3,116.59 97.28,115.57 97.28,114.55 96.52,113.79 95.76,113.79 | 95.76,110.74 94.74,109.73 C14X22.1 | 95.76,110.74 95.76,108.46 96.27,107.95 96.27,106.43 | 96.27,106.43 96.27,106.28 97.43,106.28 99.31,104.39 99.31,102.83 | 104.9,117.86 105.11,117.86 C18X22.1 | 104.9,117.86 101.09,117.86 | 108.46,116.06 106.7,116.06 104.9,117.86 | 108.46,116.06 108.46,113.03 109.6,111.89 | 109.6,111.89 109.74,111.74 C20X22.1 | 109.6,111.89 109.6,108.08 | 109.6,108.08 107.7,106.17 107.7,104.65 | 107.7,103.78 107.7,104.39 | 107.7,104.39 107.7,104.65 | C19X22.1 108.46,116.06 | C21X22.1 109.6,108.08 | 107.7,104.39 C22X22.1 107.7,104.65 | 96.27,106.43 C25X22.1 | C15X22.1 94.72,114.32 95.25,113.79 95.76,113.79 | 95.76,113.79 95.76,112.78 95.76,110.74 | v109.22,129.29 109.47,129.29 | 109.47,129.29 110.49,129.29 112.52,127.25 114.05,127.25 114.81,126.49 114.81,124.21 v116.08,122.94 | C38X22.1 v108.71,140.21 | C12X22.1 107.43,131.33 109.47,129.29
  Top 0.762: 108.33,141.11 C38X22.1 C12X22.1
  Top 1.524: L1X22.P$2 108.33,141.11
  Bottom 0.254: v87.38,83.31 91.19,83.31 v92.46,84.58 | v73.41,111 72.9,111 | v89.66,114.05 v86.36,114.05 | v121.67,117.35 123.95,115.06 v125.98,115.06 | v110.24,152.4 89.66,152.4 86.11,148.84 v80.77,148.84
  Bottom 0.508: J6X22.1 116.84,85.09 103.51,85.09 100.72,87.88 91.95,87.88 89.92,85.85 80.52,85.85 74.68,91.69 74.68,93.73 v77.47,96.52 80.26,99.31 80.26,100.33 79.25,101.35 74.68,101.35 72.9,103.12 72.9,111 v72.9,116.33 75.95,119.38 93.47,119.38 98.04,123.95 115.06,123.95 v116.08,122.94
+24V  (via drill 0.35)  (6 unrouted)
  Top 0.254: 114.68,16.39 C35.1 | R8.2 111.25,2.48 v111.25,2.41 | v92,2.43 90.55,3.88 C13.1 | C32.1 78.86,10.41 80.52,12.06 82.8,12.06 84.1,13.37 X1.4
  Top 0.508: IC2.7 114.68,16.39 | C33.1 114.18,21.21 C35.1 C34.1 | C13.1 C28.1 | C28.1 C27.1 C30.1 | C31.1 C29.1 89.02,5.97 C28.1
  Top 0.762: C31.1 87.51,11.52 X1.4 | X3.5 122,19.1 119.89,21.21 114.18,21.21
  Bottom 0.254: v111.25,2.41 92.02,2.41 v92,2.43 | 120.04,15.36 X3.4
  Bottom 1.27: X3.5 120.04,15.36 118.02,13.34 85.69,13.34 X1.4 84.1,17.42 X1.5
+24VX12  (via drill 0.35 pad 0.76)  (18 unrouted)
  Top 0.254: 24.89,139.44 C35X12.1 | R8X12.2 28.32,153.35 v28.32,153.42 | v47.58,153.4 49.02,151.95 C13X12.1 | C32X12.1 60.71,145.42 59.05,143.76 56.77,143.76 55.47,142.46 X1X12.4
  Top 0.508: IC2X12.7 24.89,139.44 | C33X12.1 25.4,134.62 C35X12.1 | C13X12.1 C28X12.1 | C28X12.1 C30X12.1 | C31X12.1 C29X12.1 50.55,149.86 C28X12.1
  Top 0.762: C31X12.1 52.07,144.31 X1X12.4 | X3X12.5 17.58,136.73 19.68,134.62 25.4,134.62
  Bottom 0.254: v28.32,153.42 47.56,153.42 v47.58,153.4 | 19.53,140.47 X3X12.4
  Bottom 1.27: X3X12.5 19.53,140.47 21.55,142.49 53.88,142.49 X1X12.4 55.47,138.41 X1X12.5
+24VX21  (via drill 0.35 pad 0.76)  (18 unrouted)
  Top 0.254: 49.02,16.39 C35X21.1 | R8X21.2 45.59,2.48 v45.59,2.41 | v26.34,2.43 24.89,3.88 C13X21.1 | C32X21.1 13.21,10.41 14.86,12.06 17.14,12.06 18.45,13.37 X1X21.4
  Top 0.508: IC2X21.7 49.02,16.39 | C33X21.1 48.52,21.21 C35X21.1 | C13X21.1 C28X21.1 | C28X21.1 C30X21.1 | C31X21.1 C29X21.1 23.37,5.97 C28X21.1
  Top 0.762: C31X21.1 21.85,11.52 X1X21.4 | X3X21.5 56.34,19.1 54.23,21.21 48.52,21.21
  Bottom 0.254: v45.59,2.41 26.36,2.41 v26.34,2.43 | 54.38,15.36 X3X21.4
  Bottom 1.27: X3X21.5 54.38,15.36 52.36,13.34 20.04,13.34 X1X21.4 18.45,17.42 X1X21.5
+24VX22  (via drill 0.35 pad 0.76)  (18 unrouted)
  Top 0.254: 90.55,139.44 C35X22.1 | R8X22.2 93.98,153.35 v93.98,153.42 | v113.24,153.4 114.68,151.95 C13X22.1 | C32X22.1 126.37,145.42 124.71,143.76 122.43,143.76 121.13,142.46 X1X22.4
  Top 0.508: IC2X22.7 90.55,139.44 | C33X22.1 91.06,134.62 C35X22.1 | C13X22.1 C28X22.1 | C28X22.1 C30X22.1 | C31X22.1 C29X22.1 116.21,149.86 C28X22.1
  Top 0.762: C31X22.1 117.73,144.31 X1X22.4 | X3X22.5 83.24,136.73 85.34,134.62 91.06,134.62
  Bottom 0.254: v93.98,153.42 113.21,153.42 v113.24,153.4 | 85.19,140.47 X3X22.4
  Bottom 1.27: X3X22.5 85.19,140.47 87.21,142.49 119.54,142.49 X1X22.4 121.13,138.41 X1X22.5
A0  (via drill 0.35)  (1 unrouted)
  Top 0.254: U1.23 119.09,68.96 118.62,68.96 117.86,68.2 | 117.86,68.2 | v116.08,66.93 116.33,67.19 116.84,67.19 117.86,68.2
A0X12  (via drill 0.35 pad 0.76)
  Top 0.254: 19.82,87.53 20.48,86.87 20.95,86.87 22.73,88.64 23.24,88.64 v23.5,88.9
A0X21  (via drill 0.35 pad 0.76)